# Altium PCB MainBoardCurrent.PcbDoc
Units mil, origin at the board's own origin, x right, y up, seen from the top; angles counter-clockwise.
Board outline 3540 x 3540 mil, 4 copper layers (Top Layer, PWR, GND, Bottom Layer), stack 61.418 mil thick; 53 components, 70 nets, 536 pads, 126 vias.
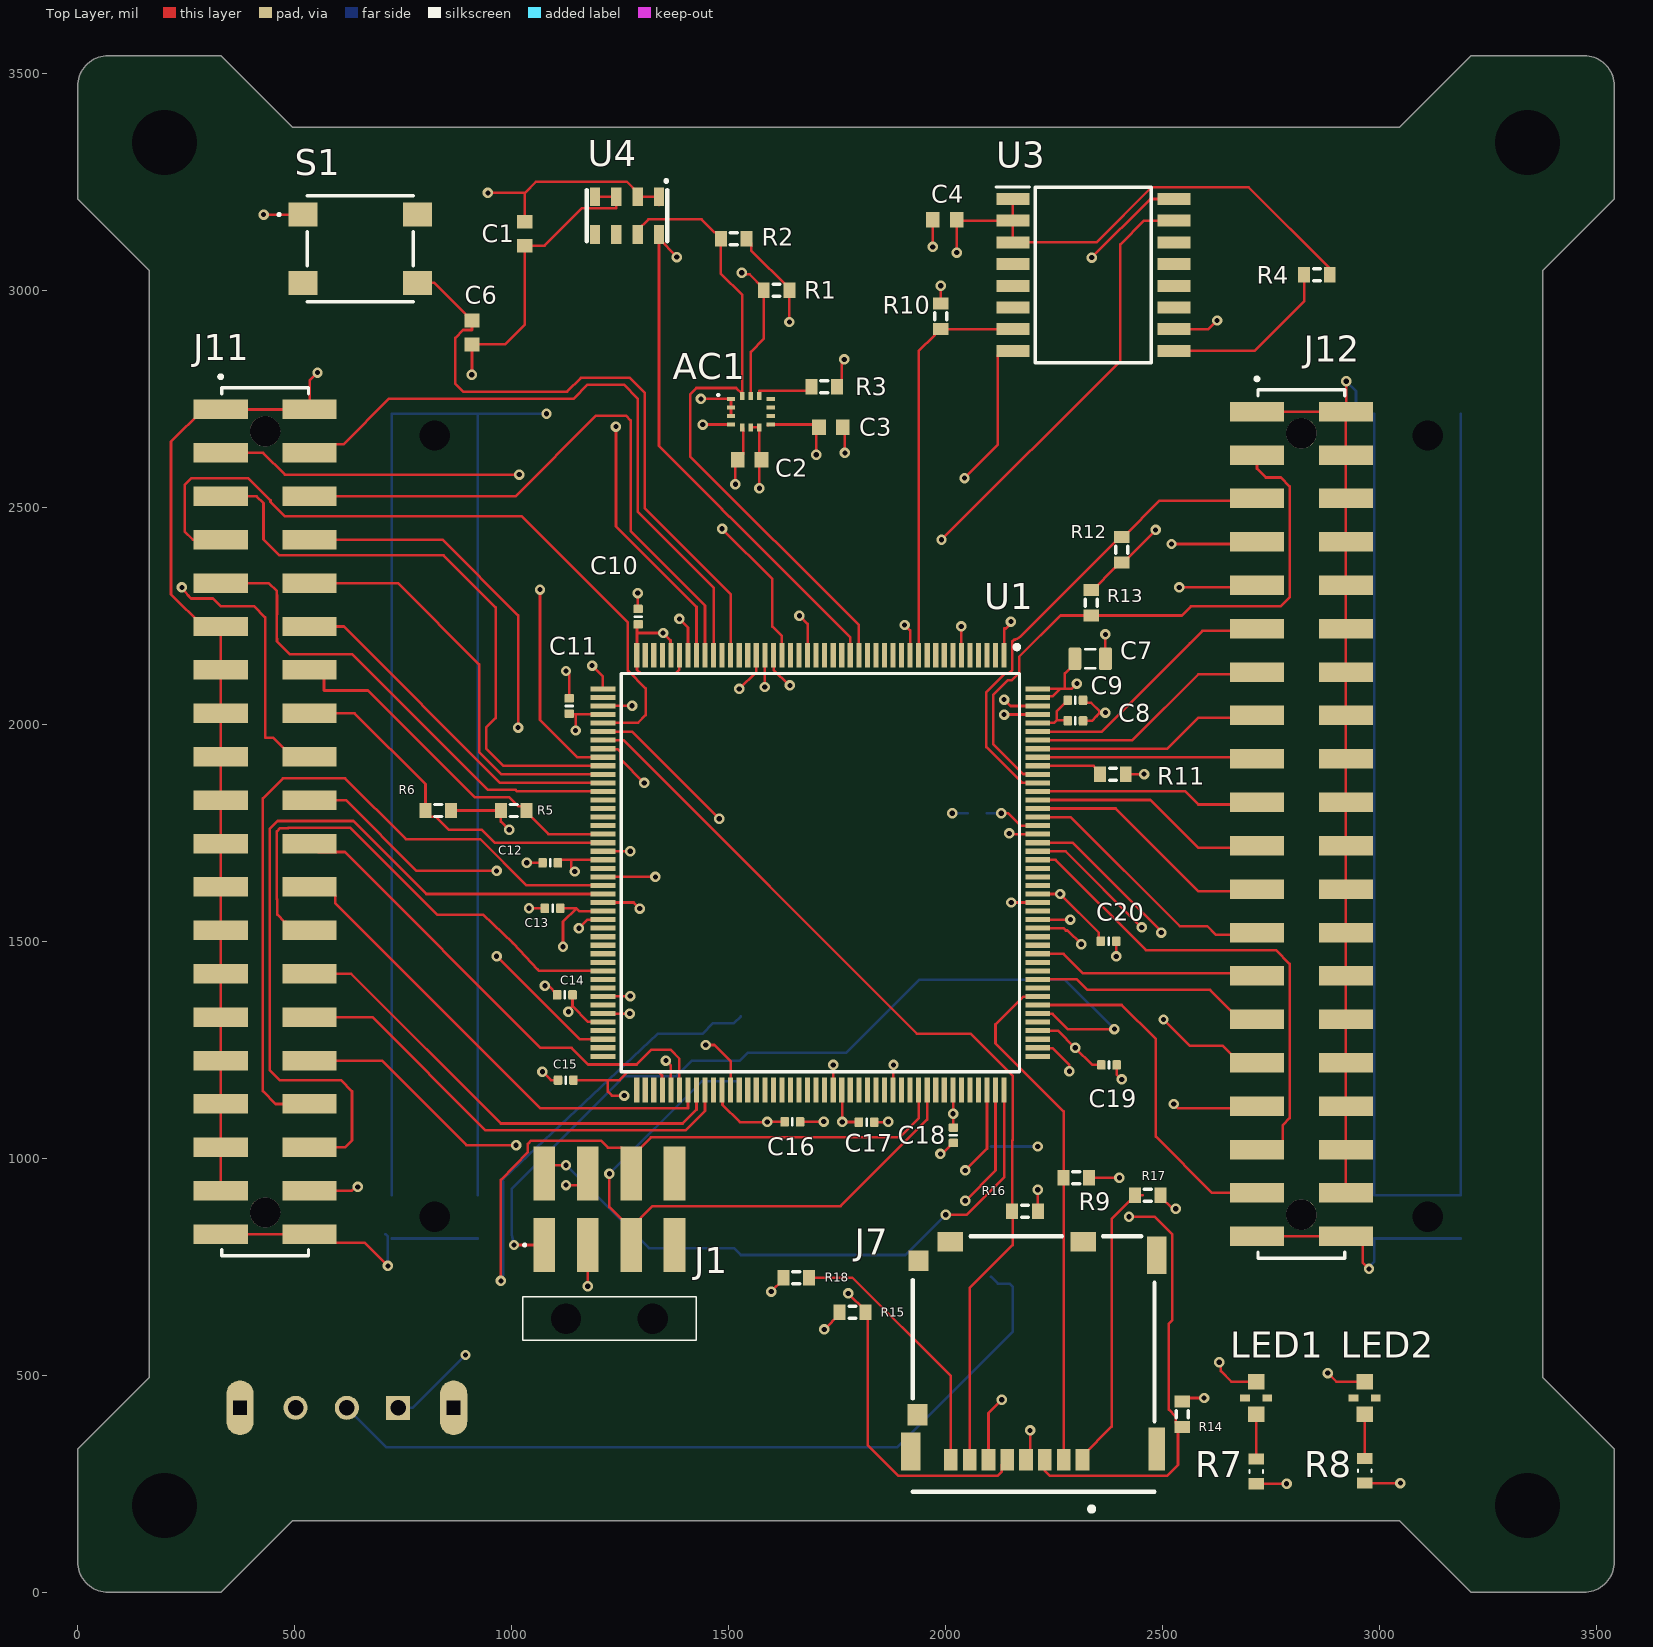
[diagram p0: Top Layer view]
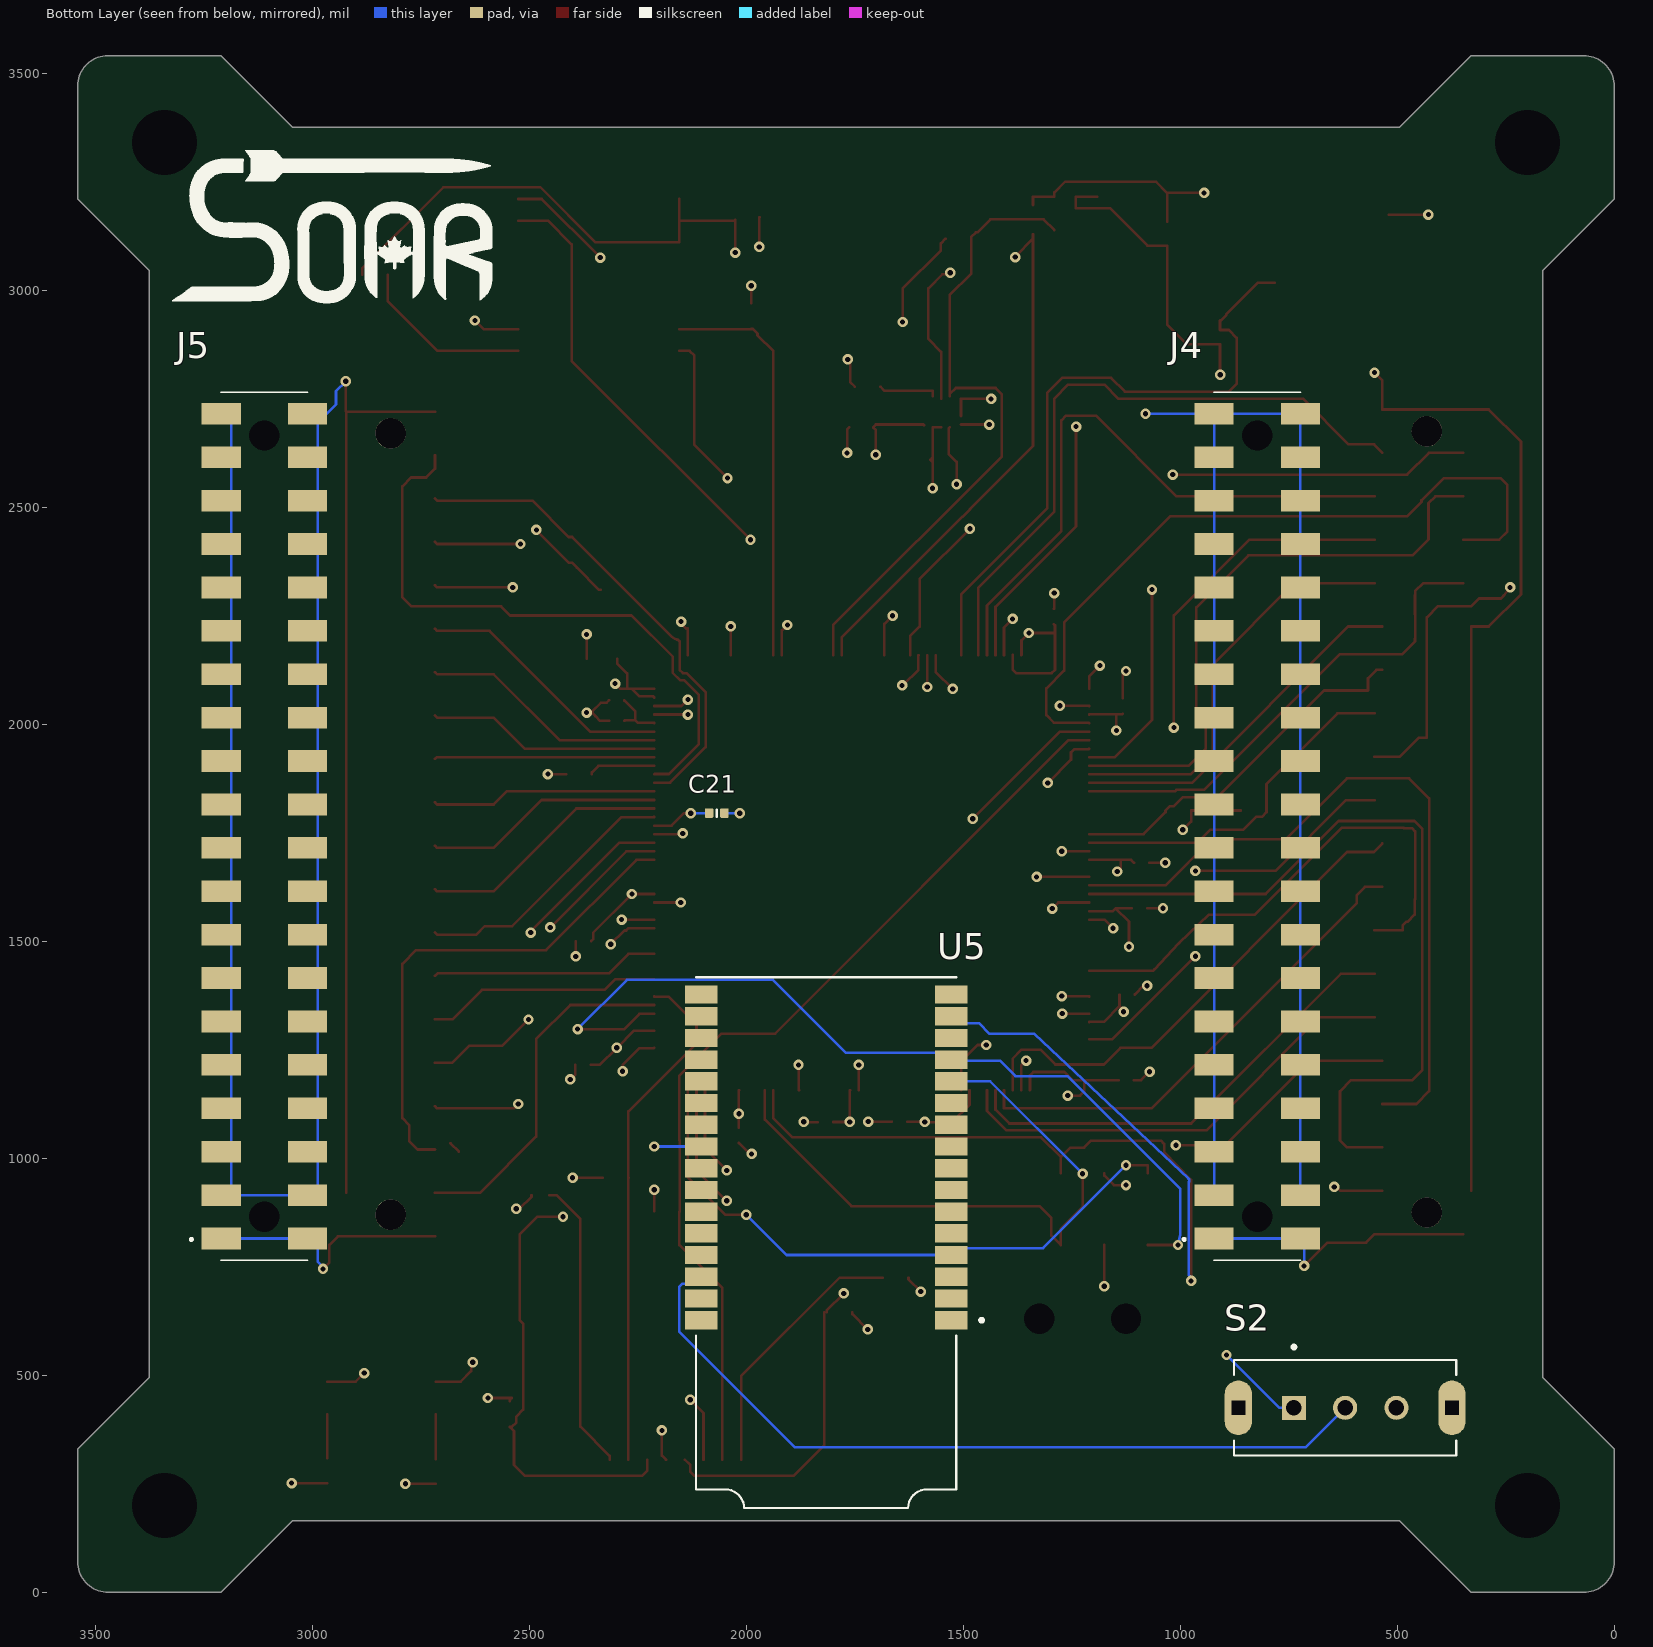
[diagram p1: Bottom Layer view, seen from below]
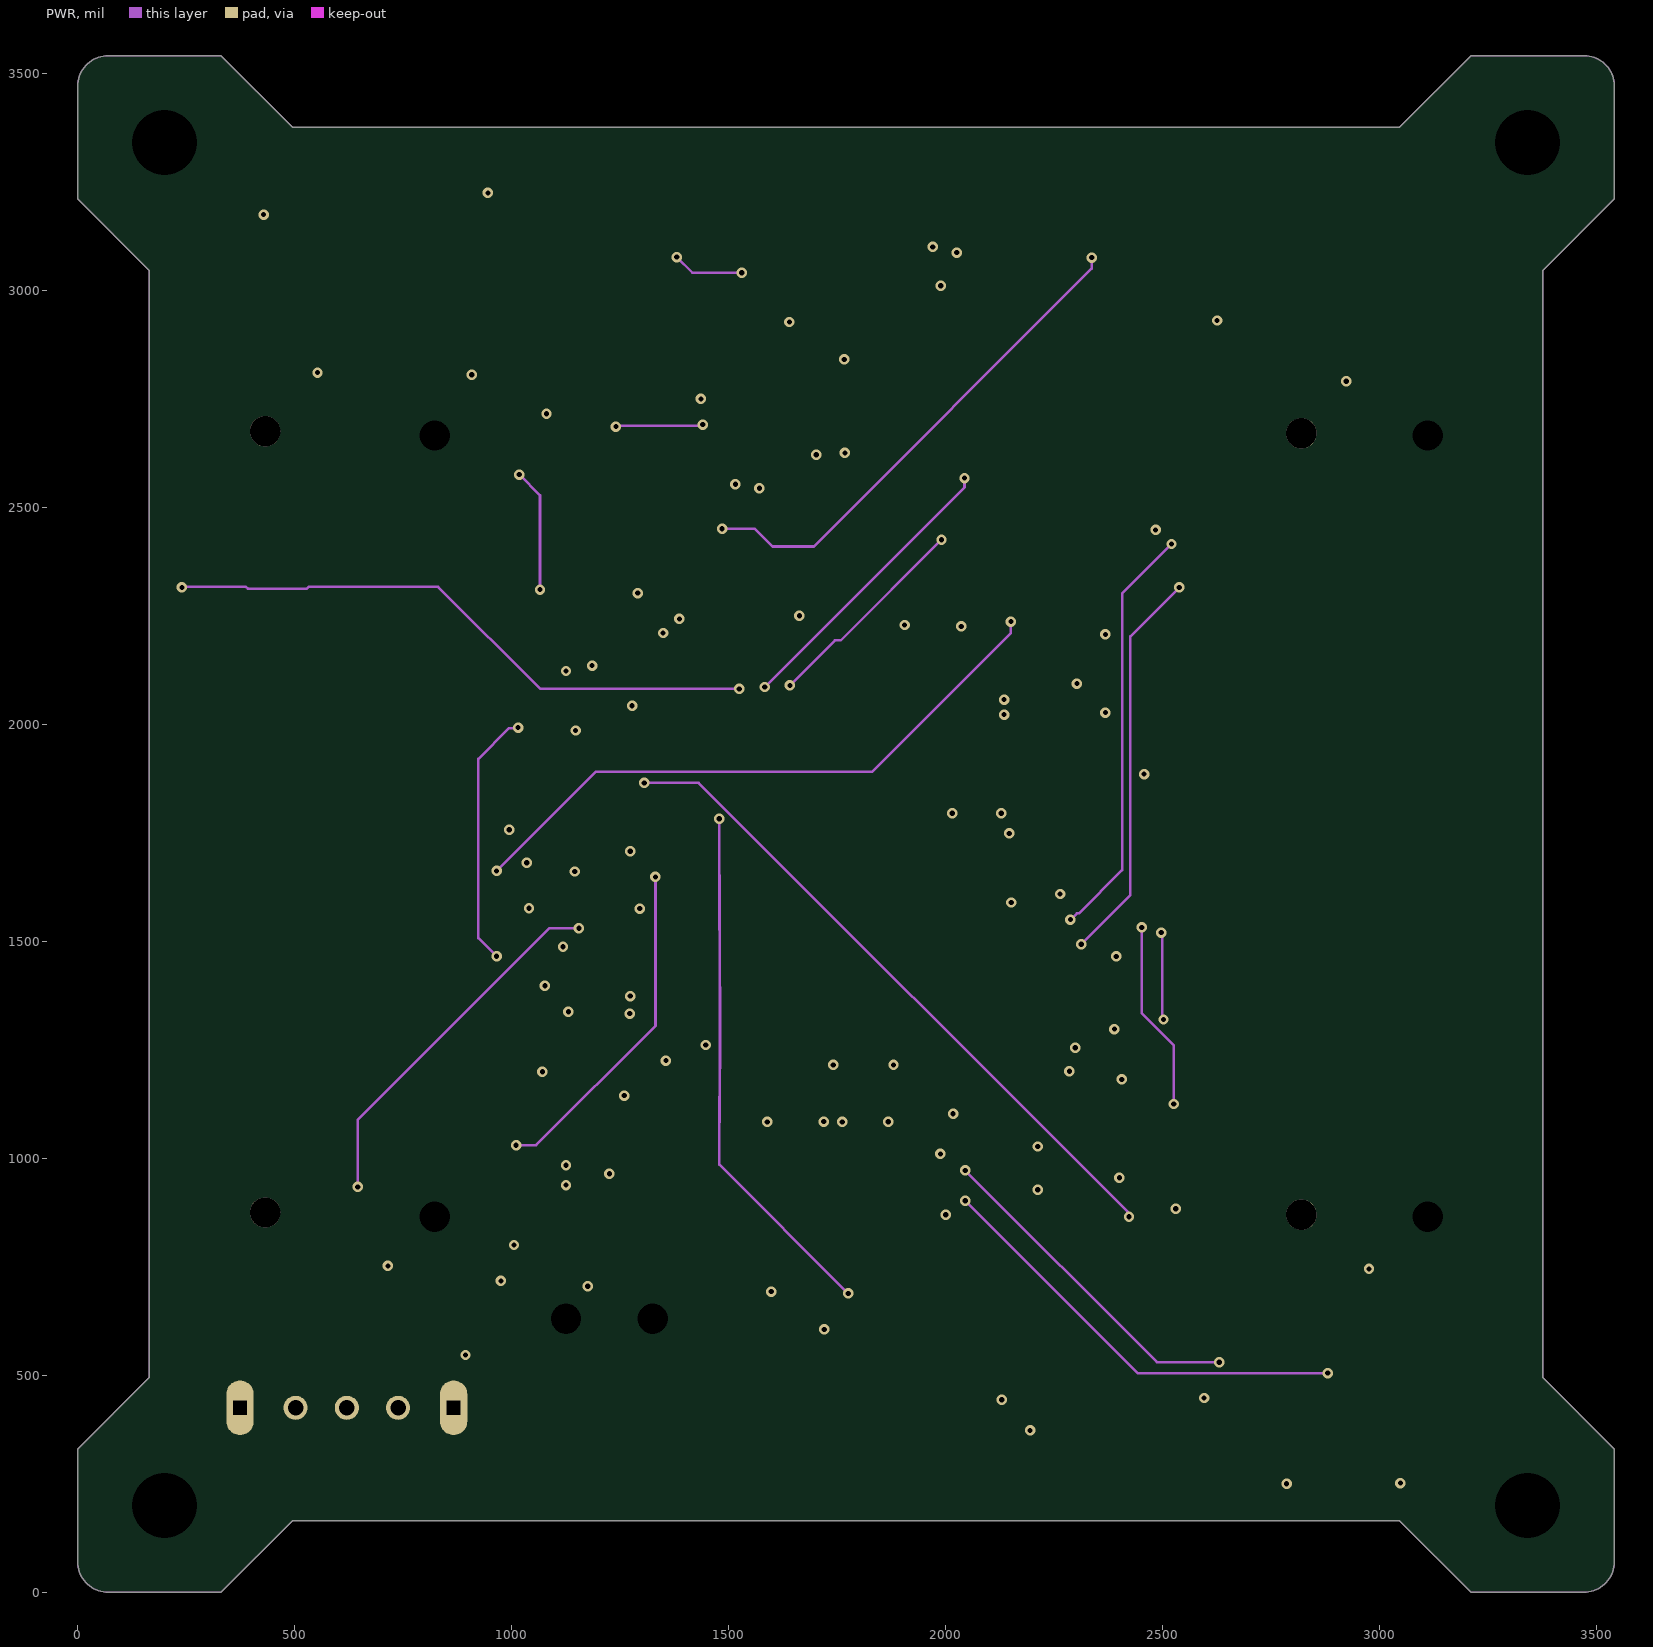
[diagram p2: PWR]
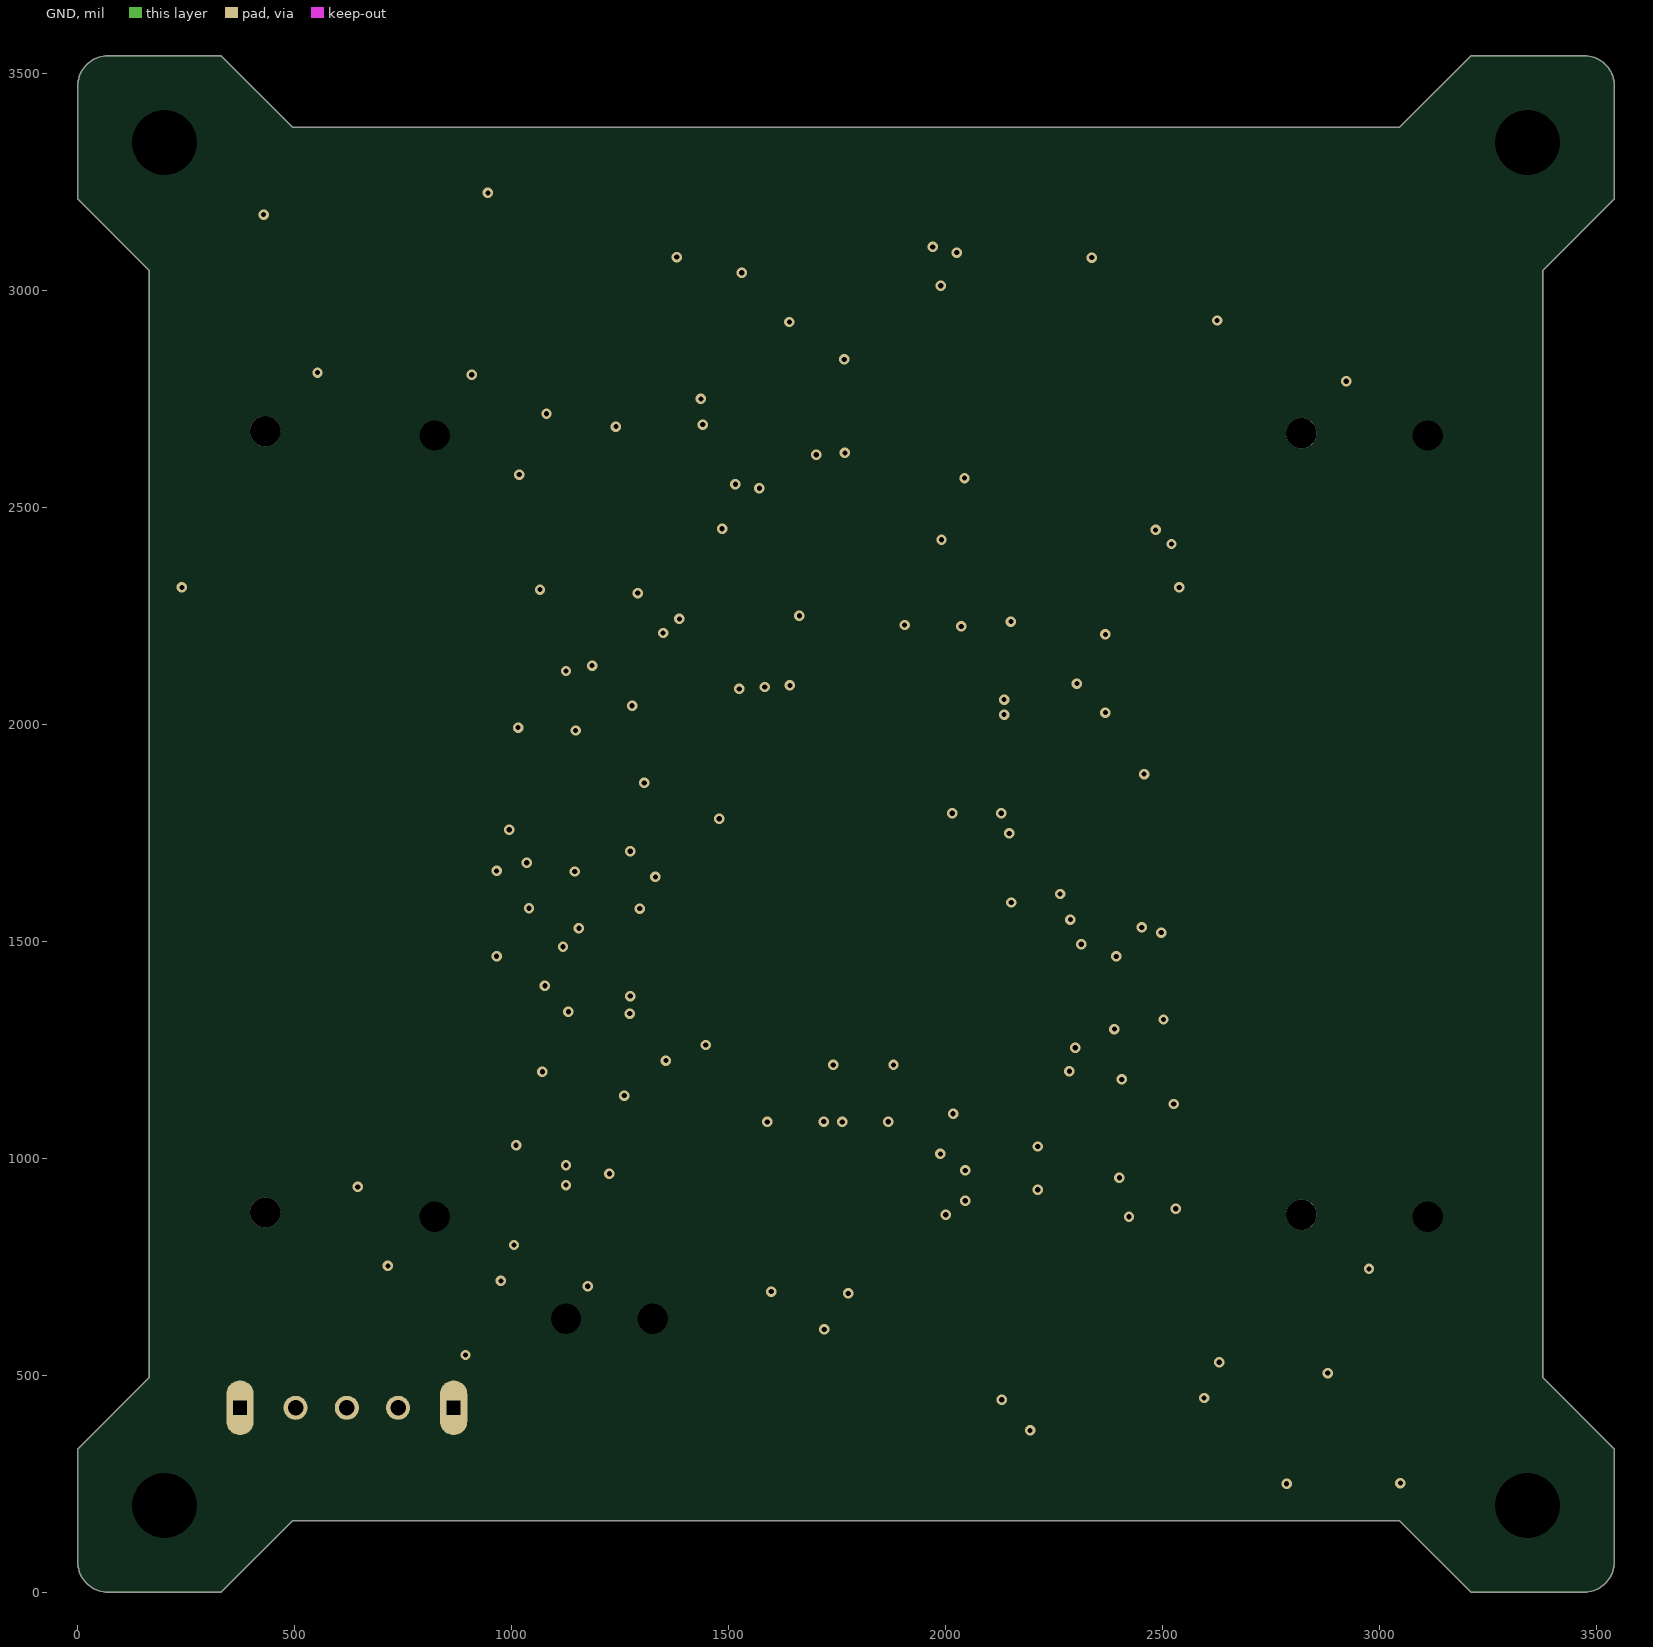
[diagram p3: GND]

## Layer stack, top to bottom
Top Solder: solder mask 0.4, Solder Resist, Dk 3.5
Top Layer: signal copper 1.378
Dielectric 2: prepreg 4.331, PP-006, Dk 4.29
PWR: signal copper 1.378
Dielectric 1: core 47.244, FR-4, Dk 4.6
GND: signal copper 1.378
Dielectric 3: prepreg 4.331, PP-006, Dk 4.29
Bottom Layer: signal copper 1.378
Bottom Solder: solder mask 0.4, Solder Resist, Dk 3.5

## Board outline
0,3470 cw(c70,3470) 70,3540 330,3540 495,3375 3045,3375 3210,3540 3471,3540 cw(c3471,3471) 3540,3471 3540,3210 3375,3045 3375,495 3540,330 3540,70 cw(c3470,70) 3470,0 3210,0 3045,165 495,165 330,0 70,0 cw(c70,70) 0,70 0,330 165,495 165,3045 0,3210

## Design rules (kind name [scope] priority, off if disabled: settings)
BoardOutlineClearance [All] p1: gap=15 ignorepadtopadclearanceinfootprint=FALSE
Clearance [All] p1: gap=10 ignorepadtopadclearanceinfootprint=TRUE except(0: Arc-Hole Track-Hole SMDPad-Hole THPad-Hole Via-Hole Fill-Hole Poly-Hole Region-Hole Text-Hole)
DiffPairsRouting [All] p1: maxlimit=20 minlimit=10 mostfreqgap=10 toplayer_minwidth=6 toplayer_maxwidth=15 toplayer_prefwidth=15 midlayer1_minwidth=6 midlayer1_maxwidth=15 midlayer1_prefwidth=15 midlayer2_minwidth=6 midlayer2_maxwidth=15 midlayer2_prefwidth=15 bottomlayer_minwidth=6 bottomlayer_maxwidth=15 bottomlayer_prefwidth=15 maxuncoupledlength=500
HoleSize [All] p1: absolutevalues=TRUE maxlimit=200 minlimit=12 maxpercent=80.000 minpercent=20.000
MinimumSolderMaskSliver [All] p1: minsoldermaskwidth=3.5
PolygonConnect PolygonConnect_8 [All vs IsNamedPolygon('Bottom_GND')] p1: thpad.connectstyle=Relief thpad.reliefconductorwidth=10 thpad.reliefentries=4 thpad.polygonreliefangle="90 Angle" thpad.airgapwidth=10 smdpad.connectstyle=Relief smdpad.reliefconductorwidth=10 smdpad.reliefentries=4 smdpad.polygonreliefangle="90 Angle" smdpad.airgapwidth=10 via.connectstyle=Direct via.reliefconductorwidth=10 via.reliefentries=4 via.polygonreliefangle="90 Angle" via.airgapwidth=10
PolygonConnect PolygonConnect_7 [All vs IsNamedPolygon('NONET_L03_P003')] p2: thpad.connectstyle=Relief thpad.reliefconductorwidth=10 thpad.reliefentries=4 thpad.polygonreliefangle="90 Angle" thpad.airgapwidth=10 smdpad.connectstyle=Relief smdpad.reliefconductorwidth=10 smdpad.reliefentries=4 smdpad.polygonreliefangle="90 Angle" smdpad.airgapwidth=10 via.connectstyle=Direct via.reliefconductorwidth=10 via.reliefentries=4 via.polygonreliefangle="90 Angle" via.airgapwidth=10
PolygonConnect PolygonConnect_6 [All vs IsNamedPolygon('3V3_PWR')] p3: thpad.connectstyle=Relief thpad.reliefconductorwidth=10 thpad.reliefentries=4 thpad.polygonreliefangle="90 Angle" thpad.airgapwidth=10 smdpad.connectstyle=Relief smdpad.reliefconductorwidth=10 smdpad.reliefentries=4 smdpad.polygonreliefangle="90 Angle" smdpad.airgapwidth=10 via.connectstyle=Direct via.reliefconductorwidth=10 via.reliefentries=4 via.polygonreliefangle="90 Angle" via.airgapwidth=10
PolygonConnect PolygonConnect_5 [All vs IsNamedPolygon('Top_GND')] p4: thpad.connectstyle=Direct thpad.reliefconductorwidth=10 thpad.reliefentries=4 thpad.polygonreliefangle="90 Angle" thpad.airgapwidth=10 smdpad.connectstyle=Relief smdpad.reliefconductorwidth=10 smdpad.reliefentries=4 smdpad.polygonreliefangle="90 Angle" smdpad.airgapwidth=10 via.connectstyle=Direct via.reliefconductorwidth=10 via.reliefentries=4 via.polygonreliefangle="45 Angle" via.airgapwidth=10
PolygonConnect PolygonConnect_4 [All vs IsNamedPolygon('Bottom_GND')] p5: thpad.connectstyle=Direct thpad.reliefconductorwidth=10 thpad.reliefentries=4 thpad.polygonreliefangle="90 Angle" thpad.airgapwidth=10 smdpad.connectstyle=Relief smdpad.reliefconductorwidth=10 smdpad.reliefentries=4 smdpad.polygonreliefangle="90 Angle" smdpad.airgapwidth=10 via.connectstyle=Relief via.reliefconductorwidth=10 via.reliefentries=4 via.polygonreliefangle="90 Angle" via.airgapwidth=10
PolygonConnect PolygonConnect_3 [All vs IsNamedPolygon('NONET_L03_P003')] p6: thpad.connectstyle=Direct thpad.reliefconductorwidth=10 thpad.reliefentries=4 thpad.polygonreliefangle="90 Angle" thpad.airgapwidth=10 smdpad.connectstyle=Relief smdpad.reliefconductorwidth=10 smdpad.reliefentries=4 smdpad.polygonreliefangle="90 Angle" smdpad.airgapwidth=10 via.connectstyle=Relief via.reliefconductorwidth=10 via.reliefentries=4 via.polygonreliefangle="90 Angle" via.airgapwidth=10
PolygonConnect PolygonConnect_2 [All vs IsNamedPolygon('3V3_PWR')] p7: thpad.connectstyle=Direct thpad.reliefconductorwidth=10 thpad.reliefentries=4 thpad.polygonreliefangle="90 Angle" thpad.airgapwidth=10 smdpad.connectstyle=Relief smdpad.reliefconductorwidth=10 smdpad.reliefentries=4 smdpad.polygonreliefangle="90 Angle" smdpad.airgapwidth=10 via.connectstyle=Relief via.reliefconductorwidth=10 via.reliefentries=4 via.polygonreliefangle="90 Angle" via.airgapwidth=10
PolygonConnect PolygonConnect_1 [All vs IsNamedPolygon('Top_GND')] p8: thpad.connectstyle=Direct thpad.reliefconductorwidth=10 thpad.reliefentries=4 thpad.polygonreliefangle="90 Angle" thpad.airgapwidth=10 smdpad.connectstyle=Relief smdpad.reliefconductorwidth=10 smdpad.reliefentries=4 smdpad.polygonreliefangle="90 Angle" smdpad.airgapwidth=10 via.connectstyle=Relief via.reliefconductorwidth=10 via.reliefentries=4 via.polygonreliefangle="90 Angle" via.airgapwidth=10
PolygonConnect [All] p9: connectstyle=Relief reliefconductorwidth=10 reliefentries=4 polygonreliefangle="90 Angle" airgapwidth=10
RoutingVias [All] p1: holewidth=12 width=24 viastyle="Through Hole" minholewidth=10 minwidth=20 maxholewidth=28 maxwidth=50
SilkToSolderMaskClearance [IsPad] p1: minsilkscreentomaskgap=1 clearancetoexposedcopper=TRUE
SolderMaskExpansion [All] p1: expansion=2 istentingtop=FALSE useseparateexpansions=TRUE expansionbottom=2 istentingbottom=FALSE
Width RF [InNetClass('RF')] p1: maxlimit=20 minlimit=6 preferedwidth=10 minimp=50.000000 maximp=50.000000 favimp=50.000000
Width Width_1 [All] p2: maxlimit=20 minlimit=6 preferedwidth=6 minimp=50.000000 maximp=50.000000 favimp=50.000000
26 further rules are at their usual default settings.

## Classes and differential pairs
polygon class Top_GND: STLINK-GND_L03_P003

## Components (designator, comment, footprint, x,y, rotation, side; value= is the part's Value field where it differs from the comment)
AC1 "LSM6DSOTR" LGA-14(2.5X3X0.86) 1550.77,2719.84 r0 top
C1 "0.1uF" 1608[0603] 1030,3130 r90 top
C2 "0.1uF" 1608[0603] 1547.85,2609.05 r0 top
C3 "0.1uF" 1608[0603] 1735.19,2683.92 r180 top
C4 "0.1uF" 1608[0603] 1997.44,3161.75 r0 top
C6 "0.1uF" 1608[0603] 908.26,2902.44 r90 top
C7 "Capacitor 4.7µF +/-40% 25V 0805" CAPC0805(2012)145_L 2332.62,2150.62 r0 top value=4.7µF
C8 "Capacitor 2,2µF +/-20% 10V 0402" CAPC0402(1005)60_L 2298.33,2007.7 r0 top value=2.2µF
C9 "Capacitor 2,2µF +/-20% 10V 0402" CAPC0402(1005)60_L 2298.33,2055.11 r0 top value=2.2µF
C10 "Capacitor 100nF +/-20% 25V 0402" CAPC0402(1005)60_L 1291.09,2247.76 r90 top value=100nF
C11 "Capacitor 100nF +/-20% 25V 0402" CAPC0402(1005)60_L 1132.15,2041.86 r90 top value=100nF
C12 "Capacitor 100nF +/-20% 25V 0402" CAPC0402(1005)60_L 1088.55,1680.65 r180 top value=100nF
C13 "Capacitor 100nF +/-20% 25V 0402" CAPC0402(1005)60_L 1094.03,1575.85 r180 top value=100nF
C14 "Capacitor 100nF +/-20% 25V 0402" CAPC0402(1005)60_L 1122.22,1376.35 r180 top value=100nF
C15 "Capacitor 100nF +/-20% 25V 0402" CAPC0402(1005)60_L 1124.22,1180 r180 top value=100nF
C16 "Capacitor 100nF +/-20% 25V 0402" CAPC0402(1005)60_L 1646.48,1083.74 r0 top value=100nF
C17 "Capacitor 100nF +/-20% 25V 0402" CAPC0402(1005)60_L 1817.36,1083.15 r0 top value=100nF
C18 "Capacitor 100nF +/-20% 25V 0402" CAPC0402(1005)60_L 2017.5,1052.85 r270 top value=100nF
C19 "Capacitor 100nF +/-20% 25V 0402" CAPC0402(1005)60_L 2375.88,1214.92 r0 top value=100nF
C20 "Capacitor 100nF +/-20% 25V 0402" CAPC0402(1005)60_L 2375,1500 r0 top value=100nF
C21 "Capacitor 100nF +/-20% 25V 0402" CAPC0402(1005)60_L 2067.72,1795 r180 bottom value=100nF
J1 "TSM-104-02-F-DH-A-P-TR" TSM-104-ZZ-YYY-DH-A-P-TR 1225,882.48 r180 top
J4 "HLE-120-02-L-DV-A" HLE-120-02-XXX-DV-A 822.59,1765 r270 bottom
J5 "HLE-120-02-L-DV-A" HLE-120-02-XXX-DV-A 3110,1765 r270 bottom
J7 "503182-1852" 5031821852 2202.52,330.26 r180 top
J11 "HW-20-16-L-D-250-SM-A-TR" SAMTEC_HW-20-16-L-D-250-SM-A-TR 329.27,2725 r270 top
J12 "HW-20-16-L-D-250-SM-A-TR" SAMTEC_HW-20-16-L-D-250-SM-A-TR 2716.78,2720 r270 top
LED1 "APTD2012LZGCK" FIL_0805J0500471MATE03 2715,447.6 r90 top
LED2 "APTD2012LQBC_D" FIL_0805J0500471MATE03 2965,447.6 r90 top
R1 "10K" J1-0603 1610,3000 r0 top value=1K
R2 "10K" J1-0603 1511.35,3118.54 r0 top value=1K
R3 "10K" J1-0603 1720,2777.37 r0 top value=1K
R4 "10K" J1-0603 2855,3035 r180 top value=1K
R5 "10K" J1-0603 1004.36,1801.06 r180 top value=1K
R6 "10K" J1-0603 830.75,1801.06 r0 top value=1K
R7 "800" RES_ERJU03F6800V 2715,278.54 r270 top value=1K
R8 "175" RES_ERJU03F6800V 2965,280 r270 top value=1K
R9 "10K" J1-0603 2300.47,955 r0 top value=1K
R10 "10K" J1-0603 1988.53,2940 r90 top value=1K
R11 "10K" J1-0603 2385,1885 r180 top value=1K
R12 "10K" J1-0603 2405,2401.75 r270 top value=1K
R13 "10K" J1-0603 2335,2280 r90 top value=1K
R14 "10K" J1-0603 2544.37,410.2 r90 top value=1K
R15 "10K" J1-0603 1785,645 r180 top value=1K
R16 "10K" J1-0603 2182.47,877.46 r0 top value=1K
R17 "10K" J1-0603 2465,915 r0 top value=1K
R18 "10K" J1-0603 1655.47,725 r180 top value=1K
S1 "430473035826" 430473035826 650.89,3095.26 r0 top
S2 "EG1206" SW_EG1206 620,425 r180 bottom
U1 "STM32H747IGT6" QFP50P2600X2600X160-176N 1711,1658 r270 top
U3 "W25Q256JVFIQ" SOIC127P1032X264-16N 2340,3035 r0 top
U4 "MS561101BA03-50" MS561101BA03-50 1265.39,3171.69 r270 top
U5 "STLINK-V3MODS" MODULE_STLINK-V3MODS 1815.81,237 r0 bottom

## Footprints (in the part's own frame and the unit in brackets; to place one, negate y for a bottom-side part, rotate by r counter-clockwise, add the part's x,y. Pads: shape width x height; smd on the part's side, far side on the other; paste and mask are expansions set on the pad)
1608[0603] [mm] "Chip Capacitor, Body 1.6x0.8mm, IPC High Density"
  rect 0.8x0.9 smd: 1(-0.7,0) 2(0.7,0)
  body extent -0.87,-0.48 0.87,0.48, height 1.3
5031821852 [mm]
  rect 0.8x1.24 smd: 1(-2.85,0.63) 2(-1.75,0.63) 3(-0.65,0.63) 4(0.45,0.63) 5(1.55,0.63) 6(2.65,0.63) 7(3.75,0.63) 8(4.85,0.63)
  rect 0.95x2.5 smd: 9(-7.195,0)
  rect 1.15x2.2 smd: 10(7.195,0.15) 15(-7.195,-11.33)
  rect 1.16x1.25 smd: 11(6.795,-2)
  rect 1.16x1.2 smd: 12(6.74,-11)
  rect 1.5x1.15 smd: 13(4.89,-12.125) 14(-2.89,-12.125)
  silkscreen extent -7.07,-12.45 7.07,3.66, body extent -7.47,-12.4 7.47,2.55, height 1.51
430473035826 [mm]
  rect 1.7x1.4 smd: 1(-3.35,2) 2(3.35,2) 3(-3.35,-2) 4(3.35,-2)
  silkscreen extent -4.8,-3.1 3.1,3.1, body extent -4.06,-3.1 4.06,3.1, height 3.8
CAPC0402(1005)60_L [mm] "Chip Capacitor, Body 1.0x0.5mm, Height 0.6mm, IPC High Density"
  rrect25% 0.5x0.55 smd: 1(-0.45,0) 2(0.45,0)
  silkscreen extent 0,-0.2 0,0.2, body extent -0.5,-0.25 0.5,0.25, height 0.6
CAPC0805(2012)145_L [mm] "Chip Capacitor, Body 2.0x1.2mm, Height 1.45mm, IPC High Density"
  rrect25% 0.76x1.3 smd: 1(-0.9,0) 2(0.89,0)
  silkscreen extent -0.3,-0.55 0.3,0.55, body extent -1,-0.6 1,0.6, height 1.45
FIL_0805J0500471MATE03 [mm]
  rect 0.9x0.95 smd: 1(-0.95,0) 2(0.95,0)
  rect 0.4x0.56 smd: 3(0,0.655) 4(0,-0.655)
HLE-120-02-XXX-DV-A [mm]
  rect 1.27x2.29 smd: 1(24.13,-2.525) 2(24.13,2.525) 3(21.59,-2.525) 4(21.59,2.525) 5(19.05,-2.525) 6(19.05,2.525) 7(16.51,-2.525) 8(16.51,2.525) 9(13.97,-2.525) 10(13.97,2.525) 11(11.43,-2.525) 12(11.43,2.525) 13(8.89,-2.525) 14(8.89,2.525) 15(6.35,-2.525) 16(6.35,2.525) 17(3.81,-2.525) 18(3.81,2.525) 19(1.27,-2.525) 20(1.27,2.525) 21(-1.27,-2.525) 22(-1.27,2.525) 23(-3.81,-2.525) 24(-3.81,2.525) 25(-6.35,-2.525) 26(-6.35,2.525) 27(-8.89,-2.525) 28(-8.89,2.525) 29(-11.43,-2.525) 30(-11.43,2.525) 31(-13.97,-2.525) 32(-13.97,2.525) 33(-16.51,-2.525) 34(-16.51,2.525) 35(-19.05,-2.525) 36(-19.05,2.525) 37(-21.59,-2.525) 38(-21.59,2.525) 39(-24.13,-2.525) 40(-24.13,2.525)
  round 0.89 hole 1.78 unplated: 41(22.86,0) 42(-22.86,0)
  silkscreen extent -25.4,-4.33 25.4,2.54
J1-0603 [mm] "Chip Resistor, Body 1.6x0.8mm, IPC High Density"
  rect 0.7x0.9 smd: 1(-0.75,0) 2(0.75,0)
  silkscreen extent -0.2,-0.35 0.2,0.35, body extent -0.85,-0.48 0.85,0.48, height 0.9
LGA-14(2.5X3X0.86) [mm]
  rect 0.475x0.25 smd: 1(-1.162,0.75) 2(-1.162,0.25) 3(-1.162,-0.25) 4(-1.162,-0.75) 8(1.162,-0.75) 9(1.162,-0.25) 10(1.162,0.25) 11(1.162,0.75)
  rect 0.25x0.475 smd: 5(-0.5,-0.913) 6(0,-0.913) 7(0.5,-0.913) 12(0.5,0.912) 13(0,0.912) 14(-0.5,0.912)
  silkscreen extent -1.93,0.95 -1.88,1.01, body extent -1.5,-1.25 1.5,1.25, height 0.86
MODULE_STLINK-V3MODS [mil]
  rect 74.8x42.13 smd: 1(-288.19,-390) 2(-288.19,-440) 3(-288.19,-490) 4(-288.19,-540) 5(-288.19,-590) 6(-288.19,-640) 7(-288.19,-690) 8(-288.19,-740) 9(-288.19,-790) 10(-288.19,-840) 11(-288.19,-890) 12(-288.19,-940) 13(-288.19,-990) 14(-288.19,-1040) 15(-288.19,-1090) 16(-288.19,-1140) 17(288.19,-1140) 18(288.19,-1090) 19(288.19,-1040) 20(288.19,-990) 21(288.19,-940) 22(288.19,-890) 23(288.19,-840) 24(288.19,-790) 25(288.19,-740) 26(288.19,-690) 27(288.19,-640) 28(288.19,-590) 29(288.19,-540) 30(288.19,-490) 31(288.19,-440) 32(288.19,-390)
  silkscreen extent -362,-1180 300,43
MS561101BA03-50 [mm]
  rect 1.1x0.6 smd: 1(-1.1,1.875) 2(-1.1,0.625) 3(-1.1,-0.625) 4(-1.1,-1.875) 5(1.1,-1.875) 6(1.1,-0.625) 7(1.1,0.625) 8(1.1,1.875)
  silkscreen extent -2.08,-2.35 1.5,2.35, body extent -1.5,-2.5 1.5,2.5, height 0.95
QFP50P2600X2600X160-176N [mm]
  rect 1.45x0.3 smd: 1(-12.725,10.75) 2(-12.725,10.25) 3(-12.725,9.75) 4(-12.725,9.25) 5(-12.725,8.75) 6(-12.725,8.25) 7(-12.725,7.75) 8(-12.725,7.25) 9(-12.725,6.75) 10(-12.725,6.25) 11(-12.725,5.75) 12(-12.725,5.25) 13(-12.725,4.75) 14(-12.725,4.25) 15(-12.725,3.75) 16(-12.725,3.25) 17(-12.725,2.75) 18(-12.725,2.25) 19(-12.725,1.75) 20(-12.725,1.25) 21(-12.725,0.75) 22(-12.725,0.25) 23(-12.725,-0.25) 24(-12.725,-0.75) 25(-12.725,-1.25) 26(-12.725,-1.75) 27(-12.725,-2.25) 28(-12.725,-2.75) 29(-12.725,-3.25) 30(-12.725,-3.75) 31(-12.725,-4.25) 32(-12.725,-4.75) 33(-12.725,-5.25) 34(-12.725,-5.75) 35(-12.725,-6.25) 36(-12.725,-6.75) 37(-12.725,-7.25) 38(-12.725,-7.75) 39(-12.725,-8.25) 40(-12.725,-8.75) 41(-12.725,-9.25) 42(-12.725,-9.75) 43(-12.725,-10.25) 44(-12.725,-10.75) 89(12.725,-10.75) 90(12.725,-10.25) 91(12.725,-9.75) 92(12.725,-9.25) 93(12.725,-8.75) 94(12.725,-8.25) 95(12.725,-7.75) 96(12.725,-7.25) 97(12.725,-6.75) 98(12.725,-6.25) 99(12.725,-5.75) 100(12.725,-5.25) 101(12.725,-4.75) 102(12.725,-4.25) 103(12.725,-3.75) 104(12.725,-3.25) 105(12.725,-2.75) 106(12.725,-2.25) 107(12.725,-1.75) 108(12.725,-1.25) 109(12.725,-0.75) 110(12.725,-0.25) 111(12.725,0.25) 112(12.725,0.75) 113(12.725,1.25) 114(12.725,1.75) 115(12.725,2.25) 116(12.725,2.75) 117(12.725,3.25) 118(12.725,3.75) 119(12.725,4.25) 120(12.725,4.75) 121(12.725,5.25) 122(12.725,5.75) 123(12.725,6.25) 124(12.725,6.75) 125(12.725,7.25) 126(12.725,7.75) 127(12.725,8.25) 128(12.725,8.75) 129(12.725,9.25) 130(12.725,9.75) 131(12.725,10.25) 132(12.725,10.75)
  rect 0.3x1.45 smd: 45(-10.75,-12.725) 46(-10.25,-12.725) 47(-9.75,-12.725) 48(-9.25,-12.725) 49(-8.75,-12.725) 50(-8.25,-12.725) 51(-7.75,-12.725) 52(-7.25,-12.725) 53(-6.75,-12.725) 54(-6.25,-12.725) 55(-5.75,-12.725) 56(-5.25,-12.725) 57(-4.75,-12.725) 58(-4.25,-12.725) 59(-3.75,-12.725) 60(-3.25,-12.725) 61(-2.75,-12.725) 62(-2.25,-12.725) 63(-1.75,-12.725) 64(-1.25,-12.725) 65(-0.75,-12.725) 66(-0.25,-12.725) 67(0.25,-12.725) 68(0.75,-12.725) 69(1.25,-12.725) 70(1.75,-12.725) 71(2.25,-12.725) 72(2.75,-12.725) 73(3.25,-12.725) 74(3.75,-12.725) 75(4.25,-12.725) 76(4.75,-12.725) 77(5.25,-12.725) 78(5.75,-12.725) 79(6.25,-12.725) 80(6.75,-12.725) 81(7.25,-12.725) 82(7.75,-12.725) 83(8.25,-12.725) 84(8.75,-12.725) 85(9.25,-12.725) 86(9.75,-12.725) 87(10.25,-12.725) 88(10.75,-12.725) 133(10.75,12.725) 134(10.25,12.725) 135(9.75,12.725) 136(9.25,12.725) 137(8.75,12.725) 138(8.25,12.725) 139(7.75,12.725) 140(7.25,12.725) 141(6.75,12.725) 142(6.25,12.725) 143(5.75,12.725) 144(5.25,12.725) 145(4.75,12.725) 146(4.25,12.725) 147(3.75,12.725) 148(3.25,12.725) 149(2.75,12.725) 150(2.25,12.725) 151(1.75,12.725) 152(1.25,12.725) 153(0.75,12.725) 154(0.25,12.725) 155(-0.25,12.725) 156(-0.75,12.725) 157(-1.25,12.725) 158(-1.75,12.725) 159(-2.25,12.725) 160(-2.75,12.725) 161(-3.25,12.725) 162(-3.75,12.725) 163(-4.25,12.725) 164(-4.75,12.725) 165(-5.25,12.725) 166(-5.75,12.725) 167(-6.25,12.725) 168(-6.75,12.725) 169(-7.25,12.725) 170(-7.75,12.725) 171(-8.25,12.725) 172(-8.75,12.725) 173(-9.25,12.725) 174(-9.75,12.725) 175(-10.25,12.725) 176(-10.75,12.725)
  silkscreen extent -13.32,-11.65 11.65,11.65
RES_ERJU03F6800V [mm]
  rect 0.65x0.9 smd: 1(-0.725,0) 2(0.725,0)
  silkscreen extent -0.08,-0.4 0.08,0.4
SAMTEC_HW-20-16-L-D-250-SM-A-TR [mm]
  rect 1.14x3.175 smd: 01(0,0) 02(0,5.205) 03(2.54,0) 04(2.54,5.205) 05(5.08,0) 06(5.08,5.205) 07(7.62,0) 08(7.62,5.205) 09(10.16,0) 10(10.16,5.205) 11(12.7,0) 12(12.7,5.205) 13(15.24,0) 14(15.24,5.205) 15(17.78,0) 16(17.78,5.205) 17(20.32,0) 18(20.32,5.205) 19(22.86,0) 20(22.86,5.205) 21(25.4,0) 22(25.4,5.205) 23(27.94,0) 24(27.94,5.205) 25(30.48,0) 26(30.48,5.205) 27(33.02,0) 28(33.02,5.205) 29(35.56,0) 30(35.56,5.205) 31(38.1,0) 32(38.1,5.205) 33(40.64,0) 34(40.64,5.205) 35(43.18,0) 36(43.18,5.205) 37(45.72,0) 38(45.72,5.205) 39(48.26,0) 40(48.26,5.205)
  round 1.78 hole 1.78 unplated: ""(1.27,2.603) ""(46.99,2.603)
  silkscreen extent -2.02,-0.1 49.53,5.14
SOIC127P1032X264-16N [mm]
  rect 1.93x0.7 smd: 1(-4.71,4.445) 2(-4.71,3.175) 3(-4.71,1.905) 4(-4.71,0.635) 5(-4.71,-0.635) 6(-4.71,-1.905) 7(-4.71,-3.175) 8(-4.71,-4.445) 9(4.71,-4.445) 10(4.71,-3.175) 11(4.71,-1.905) 12(4.71,-0.635) 13(4.71,0.635) 14(4.71,1.905) 15(4.71,3.175) 16(4.71,4.445)
  silkscreen extent -5.68,-5.14 3.4,5.15, body extent -5.16,-5.14 5.16,5.14, height 2.64
SW_EG1206 [mm]
  rect 1.408x1.408 / inner round 1.408 / far side rect 1.408x1.408 hole 0.9: 1(-3,0)
  round 1.408 hole 0.9: 2(0,0) 3(3,0)
  oval 1.6x3.2 hole 0.8 square: SH1(-6.25,0) SH2(6.25,0)
  silkscreen extent -6.5,-2.8 6.5,3.66, body extent -6.5,-5.8 6.5,2.8, height 6
TSM-104-ZZ-YYY-DH-A-P-TR [mm]
  rect 1.27x3.18 smd: 1(3.81,2.095) 2(3.81,-2.095) 3(1.27,2.095) 4(1.27,-2.095) 5(-1.27,2.095) 6(-1.27,-2.095) 7(-3.81,2.095) 8(-3.81,-2.095)
  round 0.89 hole 1.78 unplated: 9(2.54,6.4) 10(-2.54,6.4)
  silkscreen extent -5.08,2.05 5.08,7.67

## Part data
AC1: "Accelerometer", Manufacturer_Name=STMicroelectronics, Mouser Part Number=511-LSM6DSOTR, Arrow Part Number=LSM6DSOTR, Arrow Price/Stock=https://www.arrow.com/en/products/lsm6dsotr/stmicroelectronics?region=nac, Datasheet Link=https://www.st.com/resource/en/datasheet/lsm6dso.pdf, Manufacturer_Part_Number=LSM6DSOTR, Mouser Price/Stock=https://www.mouser.co.uk/ProductDetail/STMicroelectronics/LSM6DSOTR?qs=lc2O%252BfHJPVbD197C5c7oNw%3D%3D
C1 C2 C3 C4 C6: library part Cap, "Capacitor", LatestRevisionDate=17-Jul-2002, LatestRevisionNote="Re-released for DXP Platform.", PackageDescription="Radial Cap, Thru-Hole; 2 Leads; 0.3 in Pin Spacing", PackageReference=RAD-0.3, Published=8-Jun-2000, Publisher="Altium Limited"
C7: library part CMP-001-00080-4, "Chip Capacitor, 4.7µF +/-40%, 25V, 0805, Thickness 1.45 mm", Case/Package=0805, Max Operating Temperature=85°C, Min Operating Temperature=-55°C, Tolerance=20%, Voltage Rating=25V, Mounting Technology=SMT, Pins=2
C8 C9: library part CMP-001-00056-4, "Chip Capacitor, 2,2µF +/-20%, 10V, 0402, Thickness 0.6 mm", Case/Package=0402, Max Operating Temperature=85°C, Min Operating Temperature=-55°C, Tolerance=10%, Voltage Rating=10V, Mounting Technology=SMT, Pins=2
C10 C11 C12 C13 C14 C15 C16 C17 C18 C19 C20 C21: library part CMP-001-00065-4, "Chip Capacitor, 100nF +/-20%, 25V, 0402, Thickness 0.6 mm", Case/Package=0402, Max Operating Temperature=85°C, Min Operating Temperature=-55°C, Tolerance=10%, Voltage Rating=25V, Mounting Technology=SMT, Pins=2
J1: "Connector", Manufacturer_Name=SAMTEC, Datasheet Link=http://suddendocs.samtec.com/prints/tsm-1xx-xx-xxx-xx-xx-xxx-xx-mkt1.pdf, Manufacturer_Part_Number=TSM-104-02-F-DH-A-P-TR
J4 J5: "Connector", Manufacturer_Name=SAMTEC, Mouser Part Number=200-HLE12002LDVA, Arrow Part Number=HLE-120-02-L-DV-A, Arrow Price/Stock=https://www.arrow.com/en/products/hle-120-02-l-dv-a/samtec?region=nac, Datasheet Link=http://suddendocs.samtec.com/prints/hle-1xx-02-xxx-dv-xx-xx-xx-mkt.pdf, Manufacturer_Part_Number=HLE-120-02-L-DV-A, Mouser Price/Stock=https://www.mouser.co.uk/ProductDetail/Samtec/HLE-120-02-L-DV-A?qs=0lQeLiL1qyZq0rwGrAI%2FeQ%3D%3D
J7: "Connector", Manufacturer_Name=Molex, Mouser Part Number=538-503182-1852, Datasheet Link=https://www.molex.com/pdm_docs/sd/5031821852_sd.pdf, Manufacturer_Part_Number=503182-1852, Mouser Price/Stock=https://www.mouser.co.uk/ProductDetail/Molex/503182-1852?qs=s7UCm7gO1bZmpyAhCKZ26g%3D%3D
J11 J12: Package=None, Availability=Unavailable, MP=HW-20-16-L-D-250-SM-A-TR, Price=None
LED1: "LED", Manufacturer_Name=Kingbright, Mouser Part Number=604-APTD2012LZGCK, Arrow Part Number=APTD2012LZGCK, Arrow Price/Stock=https://www.arrow.com/en/products/aptd2012lzgck/kingbright?region=nac, Datasheet Link=http://www.kingbrightusa.com/images/catalog/SPEC/APTD2012LZGCK.pdf, Height=1.05mm, Manufacturer_Part_Number=APTD2012LZGCK, Mouser Price/Stock=https://www.mouser.co.uk/ProductDetail/Kingbright/APTD2012LZGCK?qs=AQlKX63v8RvUnlqpSGhMeA%3D%3D
LED2: "LED", Arrow Part Number=APTD2012LQBC/D, Manufacturer_Name=Kingbright, Mouser Part Number=604-APTD2012LQBCD, Arrow Price/Stock=https://www.arrow.com/en/products/aptd2012lqbcd/kingbright, Datasheet Link=https://componentsearchengine.com/Datasheets/1/APTD2012LQBC_D.pdf, Height=1.2mm, Manufacturer_Part_Number=APTD2012LQBC/D, Mouser Price/Stock=https://www.mouser.co.uk/ProductDetail/Kingbright/APTD2012LQBC-D?qs=AQlKX63v8RvDGqprk6aUCg%3D%3D
R1 R2 R3 R4 R5 R6 R7 R8 R9 R10 R11 R12 R13 R14 R15 R16 R17 R18: library part Res3, "Resistor", LatestRevisionDate=29-May-2009, LatestRevisionNote="IPC-7351 Footprint Added.", PackageDescription="Chip Resistor", PackageReference=J1-0603, Published=8-Jun-2000, Publisher="Altium Limited"
S1: "Switch", Manufacturer_Name="Wurth Elektronik", Mouser Part Number=710-430473035826, Datasheet Link=https://componentsearchengine.com/Datasheets/2/430473035826.pdf, Height=3.7mm, Manufacturer_Part_Number=430473035826, Mouser Price/Stock=https://www.mouser.co.uk/ProductDetail/Wurth-Elektronik/430473035826?qs=wr8lucFkNMX7XPiy2wLoYQ%3D%3D
S2: library part CMP-009-000000-1, Package=None, Availability=Unavailable, Design Item ID=EG1206, MP=EG1206, Price=None, Source=EG1206.SchLib
U1: "ARM Microcontrollers - MCU 16/32-BITS MICROS", Manufacturer_Name=STMicroelectronics, Mouser Part Number=511-STM32H747IGT6, Arrow Part Number=STM32H747IGT6, Arrow Price/Stock=https://www.arrow.com/en/products/stm32h747igt6/stmicroelectronics?region=nac, Datasheet Link=https://www.mouser.com/datasheet/2/389/dm00602212-1799407.pdf, Geometry.Height=1.6mm, Manufacturer_Part_Number=STM32H747IGT6, Mouser Price/Stock=https://www.mouser.co.uk/ProductDetail/STMicroelectronics/STM32H747IGT6?qs=%252B6g0mu59x7Kw%252BsPEalqvLg%3D%3D
U3: "Integrated Circuit", Manufacturer_Name=Winbond, Mouser Part Number=454-W25Q256JVFIQ, Arrow Part Number=W25Q256JVFIQ, Arrow Price/Stock=https://www.arrow.com/en/products/w25q256jvfiq/winbond-electronics?region=nac, Datasheet Link=https://www.winbond.com/hq/search-resource-file.jsp?partNo=W25Q256JVFIQ&type=datasheet, Height=2.64mm, Manufacturer_Part_Number=W25Q256JVFIQ, Mouser Price/Stock=https://www.mouser.co.uk/ProductDetail/Winbond/W25Q256JVFIQ?qs=qSfuJ%252Bfl%2Fd66Mf%2FmOCw4Wg%3D%3D
U4: "Integrated Circuit", Manufacturer_Name="TE Connectivity", Mouser Part Number=824-MS561101BA03-50, Arrow Part Number=MS561101BA03-50, Arrow Price/Stock=https://www.arrow.com/en/products/ms561101ba03-50/te-connectivity?region=nac, Datasheet Link=http://www.te.com/usa-en/search.html?q=ms5611&source=header, Manufacturer_Part_Number=MS561101BA03-50, Mouser Price/Stock=https://www.mouser.co.uk/ProductDetail/Measurement-Specialties/MS561101BA03-50?qs=%252BgKeJhng5iV%252BnCz6Qd5iDw%3D%3D
U5: library part CMP-005-000000-1, Package=None, Availability=Unavailable, Component Type=Standard, Design Item ID=STLINK-V3MODS, MP=STLINK-V3MODS, Pin Count=32, Price=None, Source=STLINK-V3MODS.SchLib

## Free pads (board coordinates)
  round 60 hole 150 unplated mask+10: 2(200,200) 2(200,3340) 2(3340,200) 2(3340,3340)

## Via types
v1: diameter 24, hole 12, Top Layer to Bottom Layer, 126 vias

## Nets (pads, with @x,y where several pads share a name; then routed paths per layer and width w, separated by ;. In a path a pad name is that pad's centre, name@x,y a point inside that pad or via, vN(x,y) a via of type N, cw(c..) or ccw(c..) an arc to the next point about the centre after c; other vN are vias at no path point)
3V3: AC1.5 AC1.8 C1.2 C2.1 C3.2 C4.2 C7.1 C10.1 C11.1 C12.1 C13.1 C14.1 C15.1 C16.1 C17.1 C18.1 C19.1 C20.1 C21.1 J1.4 J4.1 J4.2 J7.4 J11.39 J11.40 R1.2 R2.2 R3.2 R4.1 R5.2 R6.2 R9.2 R10.2 R11.1 R12.2 R13.2 R14.2 R15.2 R16.2 R17.2 R18.2 S2.1 U1.39 U1.40 U1.44 U1.48 U1.65 U1.71 U1.84 U1.92 U1.99 U1.113 U1.126 U1.136 U1.152 U1.160 U1.175 U1.176 U3.1 U3.2 U3.3 U4.1 U4.2 | length 6714.9
  Top Layer w6: J11.39@347.52,825 552.44,825 571.88,805.56 661.1,805.56 v1(714.66,752) ; R6.2 R5.2 974.83,1775.79 v1(993.99,1756.62) ; v1(945,3224) 1030,3224 ; C1.2 1030,3224 ; C12.1@1106.27,1680.69 1113.11,1687.53 1136.59,1687.53 ; C13.1 1148.7,1575.85 ; v1(1117.94,1487.38) 1117.94,1545.08 1148.7,1575.85 ; v1(1125,938) 1153,938 1175,960 J1.4 ; v1(1130.4,1337.57) 1130.4,1340.9 1139.94,1350.44 ; C11.1 1133.34,2022.95 1147,2022.95 ; C14.1 1139.94,1350.44 ; C15.1 1221.38,1180 ; v1(1145,1660.55) 1136.59,1668.96 1136.59,1687.53 ; v1(1147,1985.4) 1147,2022.95 ; U1.84 1209.24,1314.29 1176.09,1314.29 1139.94,1350.44 ; U1.71 1155.13,1569.42 1148.7,1575.85 ; U1.65 1136.59,1687.53 ; U1.48 1209.24,2022.95 1147,2022.95 ; v1(1259.25,1144.17) 1230.83,1144.17 1221.38,1153.62 1221.38,1180 ; C10.1 1288.55,2227.5 1288.55,2210 ; U4.1@1339.21,3196 U4.1 U4.2 1290,3224.84 1265.19,3249.65 1055.65,3249.65 1030,3224 ; U1.92 1346.05,1157.79 1346.05,1190.94 1338.43,1198.56 1267.12,1198.56 1248.56,1180 1221.38,1180 ; U1.40 1365.73,2159.76 1365.73,2192.91 v1(1348.64,2210) 1288.55,2210 ; U1.39@1385.42,2159.76 U1.39 1385.42,2158.21 1385.42,2125.06 1377.8,2117.44 1296.17,2117.44 1288.55,2125.06 1288.55,2158.21 U1.44 1288.55,2159.76 1288.55,2210 ; U1.99 1485.4,1156.24 1485.4,1123.09 1525.34,1083.15 ; v1(1515.21,2552.92) 1515.21,2603.97 C2.1 1532.84,2621.6 1532.84,2682.16 AC1.5 ; R2.2 1551.66,3107.76 1551.66,3091.81 1639.53,3003.94 R1.2 v1(1639.53,2926.47) ; v1(1588.77,1083.74) C16.1 ; AC1.8@1590.18,2688.39 1592.1,2690.32 AC1.8 1701.23,2690.32 C3.2 1701.23,2677.52 v1(1701.23,2620.86) ; v1@1595,692.84 v1(1597.72,692.84) 1625.94,721.06 R18.2 ; v1@1720,605 v1(1720,605.59) 1755.47,641.06 R15.2 ; R3.2 1760.31,2788.15 1760.31,2829.89 1766,2835.58 v1(1766,2840.45) v1@1765.08,2839.54 ; U1.113 1760.99,1156.24 1760.99,1084.34 v1(1761.59,1083.74) 1761.88,1083.45 1799.35,1083.45 C17.1 ; R10.2 v1(1988.53,3010) ; U1.126 2016.81,1156.32 v1(2016.81,1102.57) 2016.81,1071.26 C18.1 ; v1(2025,3086.37) C4.2 2026.75,3160 U3.2 ; v1(2127.69,1795) 2143.09,1795 2171.82,1766.27 U1.160 ; U3.1 U3.2 ; J7.4 2194.18,314.83 v1(2194.18,373) ; R16.2 v1(2212,927.28) ; U1.136 2258.49,1293.83 v1(2297.95,1254.37) 2337.4,1214.92 C19.1 ; U1.152 v1(2263.35,1608.79) 2352.31,1519.83 2352.31,1504.98 C20.1 ; U1.175 2214.89,2064.45 2246.76,2064.45 2263.54,2081.23 ; U1.176 2263.54,2081.23 ; C7.1 2297.19,2139.99 2274.07,2116.87 2274.07,2081.23 ; v1(2302,2093.47) 2289.75,2081.23 2274.07,2081.23 ; R9.2 v1(2400,955) ; R13.2 2338.94,2309.53 2390.28,2360.87 2390.28,2361.44 2401.06,2372.22 R12.2 2408.94,2372.22 2483.29,2446.57 v1(2483.29,2447.44) ; R11.1 v1(2456.83,1885) ; R17.2 2494.53,911.06 2521.94,883.65 v1(2529.49,883.65) ; R14.2 2544.37,443.3 R14.2@2540.07,447.6 ; R4.1 2884.53,3049.72 2697.25,3237 2474,3237 2347,3110 U3.3 U3.2 ; 1525.34,1083.15 1588.77,1083.15 1525.34,1083.15 ; 2263.54,2081.23 2274.07,2081.23 ; R14.2@2540.07,447.6 v1(2595,447.6) R14.2@2540.07,447.6
  Bottom Layer w6: J4.2@708.68,825.07 J4.2@714.66,819.09 ; v1@718.1,755.44 v1(714.66,752) ; J4.2 J4.1 ; S2.1 771.64,425 v1(893.32,546.68) ; C21.1@2094.38,1795 v1(2127.69,1795) ; v1(714.66,752) J4.2@714.66,819.09 ; v1(714.66,752) J4.2@714.66,819.09
5V: J5.1 J5.2 J12.39 J12.40 | length 587
  Top Layer w6: J12.39 J12.40 2940.71,820 2960.15,800.56 2960.15,759.85 v1(2975,745)
  Bottom Layer w6: v1(2975,745) 2975,749.87 2987.04,761.91 2987.04,766.91 2987.08,766.95 2987.08,815 J5.1@3185.9,815
GND: AC1.1 AC1.2 AC1.3 AC1.6 AC1.7 C1.1 C2.2 C3.1 C4.1 C6.1 C7.2 C8.2 C9.2 C10.2 C11.2 C12.2 C13.2 C14.2 C15.2 C16.2 C17.2 C18.2 C19.2 C20.2 C21.2 J1.3 J4.3 J4.4 J4.5 J4.6 J4.7 J4.8 J4.9 J4.10 J4.11 J4.12 J4.13 J4.14 J4.15 J4.16 J4.17 J4.18 J4.19 J4.20 J4.21 J4.22 J4.23 J4.24 J4.25 J4.26 J4.27 J4.28 J4.29 J4.30 J4.31 J4.32 J4.33 J4.34 J4.35 J4.36 J4.37 J4.38 J4.39 J4.40 J5.3 J5.4 J5.5 J5.6 J5.7 J5.8 J5.9 J5.10 J5.11 J5.12 J5.13 J5.14 J5.15 J5.16 J5.17 J5.18 J5.19 J5.20 J5.21 J5.22 J5.23 J5.24 J5.25 J5.26 J5.27 J5.28 J5.29 J5.30 J5.31 J5.32 J5.33 J5.34 J5.35 J5.36 J5.37 J5.38 J5.39 J5.40 J7.6 J11.01 J11.02 J11.11 J11.13 J11.15 J11.17 J11.19 J11.21 J11.23 J11.25 J11.27 J11.29 J11.31 J11.33 J11.35 J11.37 J12.01 J12.02 J12.04 J12.06 J12.08 J12.10 J12.12 J12.14 J12.16 J12.18 J12.20 J12.22 J12.24 J12.26 J12.28 J12.30 J12.32 J12.34 J12.36 J12.38 R7.2 R8.2 S1.1 U1.6 U1.12 U1.24 U1.38 U1.45 U1.47 U1.64 U1.70 U1.81 U1.83 U1.93 U1.100 U1.112 U1.119 U1.134 U1.151 U1.159 U1.173 U1.174 U3.10 U4.3 U4.4 U5.24 | length 17851.1
  Top Layer w6: J11.37 J11.35 J11.33 J11.31 J11.29 J11.27 J11.25 J11.23 J11.21 J11.19 J11.17 J11.15 J11.13 J11.11 289.21,2225 215,2299.21 215,2650.79 289.21,2725 J11.01 J11.02 534.19,2791.75 v1(552.44,2810) ; v1(428.25,3174) S1.1 ; v1(908,2805) 908.26,2805.26 C6.1 984,2874.88 1030,2920.88 C1.1 1075.44,3102.44 1161.79,3188.79 1240.79,3188.79 U4.3 U4.4 ; v1(1034.27,1680.65) C12.2 ; v1(1039.76,1575.85) C13.2 ; v1(1070.63,1199.37) 1090,1180 C15.2 ; v1(1076.31,1397.42) 1084.42,1397.42 1104.51,1377.33 C14.2 ; v1(1125,2122.54) 1132.15,2115.39 C11.2 ; v1(1175,705) J1.3 ; v1(1185,2135) 1210.02,2109.98 U1.45 ; U1.83 v1(1271.87,1333.2) ; U1.81 1210.53,1373.08 1272.48,1373.08 v1(1273,1373.6) ; U1.70 1280.9,1589.1 v1(1295,1575) ; U1.64 v1(1273,1707.21) ; U1.47 1210.29,2042.13 1276.92,2042.13 v1(1277.2,2042.41) ; v1(1290,2302) 1290,2266.57 C10.2 ; v1(1355,1225) 1366.51,1213.49 U1.93 ; v1(1386.2,2242.51) 1405.88,2222.82 U1.38 ; v1(1435.78,2749.37) AC1.1 AC1.2 AC1.3 ; v1(1446.74,1260.91) 1467.04,1260.91 1504.31,1223.64 U1.100 ; AC1.6 AC1.7 C2.2@1570.45,2614 ; v1(1570.45,2543.29) C2.2@1570.45,2604.09 ; v1(1662.7,2250) 1681.47,2231.23 U1.24 ; C16.2 1664.49,1084.04 1718.23,1084.04 v1(1718.53,1084.34) ; U1.112 v1(1740.53,1215) ; C3.1 1767.56,2679.11 v1(1767.56,2625) ; C17.2 1866.69,1083.15 v1(1867.46,1083.92) ; U1.119 1878.89,1157.58 1878.89,1214.43 v1(1879.45,1215) ; v1(1905,2228.39) 1917.69,2215.7 U1.12 ; C4.1@1969.38,3167.85 1969.88,3167.35 C4.1 v1(1969.88,3099.62) ; v1(1987.54,1010) 1991.39,1010 2016.52,1035.13 C18.2 ; v1@2035,2225.53 v1(2035.4,2225.13) 2035.8,2224.72 U1.6 ; J7.6 2098.19,412.76 v1(2129.03,443.61) ; v1(2134.23,2022.17) U1.173 ; v1(2134.23,2056.58) 2134.48,2056.58 2149.2,2041.86 U1.174 ; v1@2144.63,1750 v1(2146.34,1748.29) 2148.05,1746.58 U1.159 ; v1(2150.71,1589.1) U1.151 ; U1.134 2212.76,1253.68 2245.91,1253.68 2284.67,1214.92 v1(2284.67,1200.18) ; C8.2 2336.59,2007.7 2347.38,2018.49 2354.08,2025.19 ; C9.2 2321.8,2049.36 2334.88,2049.36 2354.08,2030.16 2354.08,2025.19 ; v1(2367.66,2026.58) 2366.27,2025.19 2354.08,2025.19 ; C7.2 v1(2367.66,2206.77) ; v1(2392.72,1465) C20.2 ; C19.2 2393.59,1193.11 v1(2405.18,1181.53) ; U3.10 2605,2910 v1(2625,2930) ; R7.2 v1(2785,250) v1@2786.46,251.46 ; J12.01 J12.02 ; J12.38 J12.36 J12.34 J12.32 J12.30 J12.28 J12.26 J12.24 J12.22 J12.20 J12.18 J12.16 J12.14 J12.12 J12.10 J12.08 J12.06 J12.04 J12.02 ; v1(2922.44,2790) 2922.44,2720.74 J12.02 ; R8.2 v1(3047.31,251.46) v1@3050.85,255 ; C2.2@1570.45,2604.09 C2.2@1570.45,2614 ; C2.2@1570.45,2604.09 C2.2 C2.2@1570.45,2614
  Bottom Layer w6: J4.4 J4.6 J4.8 J4.10 J4.12 J4.14 J4.16 J4.18 J4.20 J4.22 J4.24 J4.26 J4.28 J4.30 J4.32 J4.34 J4.36 J4.38 J4.40 J4.39 ; J4.3 J4.5 J4.7 J4.9 J4.11 J4.13 J4.15 J4.17 J4.19 J4.21 J4.23 J4.25 J4.27 J4.29 J4.31 J4.33 J4.35 J4.37 J4.39 ; v1(1080,2715) J4.39 ; v1(2015,1795) C21.2 ; U5.24 v1(2212,1027) ; v1(2922.44,2790) 2945,2767.44 2945,2737 2967,2715 J5.40@2987.08,2715 ; J5.18@2987.08,1615 J5.4@2987.08,915 ; J5.34@2987.08,2415 J5.40@2987.08,2715 ; J5.17@3185.9,1615 J5.3@3185.9,915 ; J5.39@3185.9,2715 J5.3@3185.9,915 ; J5.4@2987.08,915 J5.3@3185.9,915 ; J5.4@2987.08,915 J5.40@2987.08,2715
"GPIO PA2": LED1.2 U1.130 | length 1088.1
  Top Layer w6: v1(2044.6,972) 2094.86,1022.26 U1.130 ; v1(2630,530) 2633.44,526.56 2633.44,509.27 2657.72,485 LED1.2
  PWR w6: v1(2044.6,972) 2486.6,530 v1(2630,530)
"GPIO PA3": LED2.2 U1.131 | length 1376.6
  Top Layer w6: v1(2044.95,902) 2114.54,971.59 U1.131 ; v1(2880,505) 2900,485 LED2.2
  PWR w6: v1(2044.95,902) 2441.95,505 v1(2880,505)
"GPIO PA4": J11.07 U1.49 | length 1720.5
  Top Layer w6: J11.07@347.52,2425 J11.07 264.99,2425 246.5,2443.49 246.5,2551 262.5,2567 392.75,2567 444,2515.75 444,2511.86 476.61,2479.25 1022.75,2479.25 1267.27,2234.73 1267.27,2123.71 1308.44,2082.54 1308.44,2020.8 1290.91,2003.27 1210.8,2003.27 U1.49
"GPIO PA15": J12.37 U1.139 | length 816.8
  Top Layer w6: U1.139@2212.76,1352.1 U1.139 2405.18,1352.88 2483.73,1274.33 2483.73,1049.73 2613.46,920 J12.37
"GPIO PB0": J11.10 U1.55 | length 958.7
  Top Layer w6: J11.10@552.44,2325 738,2325 925,2138 925,1935.56 976.18,1884.38 U1.55
"GPIO PB1": J11.12 U1.56 | length 825.1
  Top Layer w6: J11.12 612.93,2225 973.24,1864.69 U1.56
"GPIO PB2": J11.09 U1.57 | length 1128.9
  Top Layer w6: J11.09@347.52,2325 440,2325 458.69,2306.31 458.69,2297.17 459,2296.86 459,2253.14 458.69,2252.83 458.69,2197.17 459,2196.86 459,2191 489,2161 632.56,2161 944.87,1848.69 1008.88,1848.69 1012.57,1845.01 U1.57
"GPIO PB3": J12.23 U1.162 | length 585.8
  Top Layer w6: U1.162 2391.09,1805.64 2581.72,1615 2711.78,1615 J12.23
"GPIO PB4": J12.21 U1.163 | length 552.6
  Top Layer w6: U1.163 2471.4,1825.32 2581.72,1715 2711.78,1715 J12.21
"GPIO PB5": J12.19 U1.164 | length 519.3
  Top Layer w6: U1.164 2551.72,1845.01 2581.72,1815 2711.78,1815 J12.19
"GPIO PC3_C": AC1.4 U1.37 | length 870.7
  Top Layer w6: v1(1240,2685.62) 1240,2455.9 1425.57,2270.34 U1.37 ; v1@1440,2690 v1(1440.16,2690.16) 1440.32,2690.32 AC1.4
  PWR w6: v1(1240,2685.62) 1242.27,2687.89 1437.89,2687.89 v1(1440.16,2690.16)
"GPIO PC4": J11.03 U1.53 | length 1456.1
  Top Layer w6: J11.03@347.52,2625 427,2625 477,2575 v1(1017.26,2575) ; v1(1065,2310) 1065,2009.75 1151,1923.75 U1.53
  PWR w6: v1(1017.26,2575) 1065,2527.26 v1(1065,2310)
"GPIO PC5": J11.05 U1.54 | length 1390
  Top Layer w6: J11.05@347.52,2525 412.13,2525 428,2509.13 428,2425.75 464.75,2389 843,2389 963,2269 963,2014 941,1992 941,1944 980.94,1904.06 U1.54
"GPIO PC10": J7.2 R9.1 U1.140 | length 1841.6
  Top Layer w6: U1.140 2211.21,1371.79 2178.06,1371.79 2114.54,1308.28 2114.54,1264.46 2271.42,1107.58 2271.42,955.47 R9.1 ; J7.2 2271.42,955 J7.2
"GPIO PC15": R10.1 U1.11 U3.7 | length 941.2
  Top Layer w6: U1.11 1937.38,2859.32 1973.82,2895.76 1973.82,2899.69 1984.6,2910.47 R10.1 1989,2910 U3.7
"GPIO PD14": J11.30 U1.97 | length 1067.5
  Top Layer w6: J11.30@552.44,1325 679,1325 939.7,1064.3 940,1064 1400.19,1064 1445.25,1109.06 U1.97
"GPIO PE0": J12.13 U1.170 | length 569.8
  Top Layer w6: U1.170 2429.84,1963.12 2581.72,2115 2711.78,2115 J12.13
"GPIO PE1": J12.11 U1.171 | length 603.1
  Top Layer w6: U1.171 2359.24,1982.8 2562.28,2185.84 2591.44,2215 2711.78,2215 J12.11
"GPIO PG15": J12.25 U1.161 | length 620.2
  Top Layer w6: U1.161 2211.98,1786.73 2212.76,1785.95 2287.68,1785.95 2539.19,1534.44 2602.34,1534.44 2621.78,1515 2711.78,1515 J12.25
I2C1-SCL: J12.05 R12.1 U1.165 | length 1125
  Top Layer w6: U1.165 2211.2,1865.47 2175.11,1865.47 2093.23,1947.36 2093.23,2073.56 2137.11,2117.44 2145.52,2117.44 2153.13,2125.06 2153.13,2190.62 2156.65,2194.13 2160.04,2195.07 ccw(c2153.13,2220.18) 2171.57,2201.78 2401.06,2431.27 R12.1 2408.94,2431.27 2492.66,2515 2711.78,2515 J12.05
I2C1-SDA: J12.03 R13.1 U1.166 | length 1422
  Top Layer w6: U1.166 2211.2,1885.16 2178.06,1885.16 2109.23,1953.99 2109.23,2066.94 2143.73,2101.44 2152.15,2101.44 2169.13,2118.43 2169.13,2155.5 2264.1,2250.47 R13.1 2543.93,2250.47 2564.78,2271.32 2771.43,2271.32 2792.28,2292.17 2792.28,2547.83 2771.87,2568.24 2737.2,2568.24 2716.78,2588.66 J12.03
I2C2-SCL: AC1.13 R1.1 U1.19 U4.8 | length 1708.8
  Top Layer w6: U4.8 U4.8@1339.21,3118.54 ; v1(1380,3076) 1380,3077.76 U4.8@1339.21,3118.54 ; v1(1530,3040) 1533.44,3036.56 1547.85,3036.56 1580.47,3003.94 R1.1 1580.47,2887.67 1550.77,2857.97 AC1.13 AC1.13@1550.77,2749.66 ; U1.19 1779.9,2200.1 1502.31,2477.69 1501.35,2477.69 1484.37,2494.68 1484.37,2495.63 1339.21,2640.79 U4.8@1339.21,3118.54
  PWR w6: v1(1380,3076) 1416,3040 v1(1530,3040)
I2C2-SDA: AC1.14 R2.1 U1.18 U4.7 | length 1504.4
  Top Layer w6: U4.7@1290,3138.23 1314.81,3163.04 1437.33,3163.04 1467.1,3133.26 1471.04,3133.26 1481.82,3122.48 R2.1 1481.82,3037.63 1531.08,2988.37 AC1.14 1531.08,2760.2 1516.91,2774.37 1425.43,2774.37 1410.78,2759.73 1410.78,2617.12 1799.51,2228.39 1799.51,2184.53 U1.18
I2C4-SCL: J11.14 R5.1 U1.62 | length 851.2
  Top Layer w6: J11.14 547.93,2125 567.37,2105.56 567.37,2077.63 668.39,2077.63 914.24,1831.78 993.99,1831.78 1014.62,1811.15 1023.79,1811.15 R5.1 1033.88,1797.13 1084.43,1746.58 U1.62
I2C4-SDA: J11.16 R6.1 U1.63 | length 818.9
  Top Layer w6: J11.16@552.44,2025 638,2025 801.22,1861.78 R6.1 801.22,1797.13 812,1786.35 825.11,1786.35 854.84,1756.62 930.89,1756.62 960.62,1726.9 U1.63
NetAC1_12: AC1.12 R3.1 | length 246.8
  Top Layer w6: AC1.12 1570.45,2768 ; R3.1 R3.1@1681.1,2768 ; 1570.45,2768 R3.1@1681.1,2768 ; 1570.45,2768 R3.1@1681.1,2768
NetC8_1: C8.1 C9.1 U1.172 | length 128.4
  Top Layer w6: U1.172 2212.42,2002.92 2249.53,2002.92 2255.52,2008.92 ; C8.1 2279.39,2008.92 2255.52,2008.92 ; C9.1 2280.61,2054.13 2255.52,2029.04 2255.52,2008.92
NetJ7_1: J7.1 R17.1 | length 753.7
  Top Layer w6: J7.1 2314.72,314.12 2382.06,381.45 2382.06,860.41 ; 2453.15,915 R17.1@2436.64,915 ; 2382.06,860.41 R17.1@2436.64,915 ; 2382.06,860.41 R17.1@2436.64,915
NetJ7_8: J7.8 R18.1 | length 613
  Top Layer w6: R18.1 1784.41,725 2011.57,497.83 J7.8
NetLED1_1: LED1.1 R7.1 | length 103.1
  Top Layer w6: R7.1 LED1.1
NetLED2_1: LED2.1 R8.1 | length 101.7
  Top Layer w6: R8.1 LED2.1
NetR4_2: R4.2 U3.9 | length 408.3
  Top Layer w6: U3.9 2711.47,2860 2825.47,2974 R4.2
NetR11_2: R11.2 U1.167 | length 153.7
  Top Layer w6: U1.167 2340.35,1904.06 2355.47,1888.94 R11.2
NetS2_2: S2.2 U5.30 | length 1845.5
  Bottom Layer w6: S2.2 710.99,334.01 1887.86,334.01 2154.4,600.55 2154.4,703.45 2146.78,711.07 2119.94,711.07 U5.30
NRST(Reset): C6.2 S1.4 U1.33 | length 1494.1
  Top Layer w6: S1.4 821.74,3016.52 893.54,2944.72 893.54,2942.75 906.29,2930 C6.2 908.26,2908 888,2908 870,2890 870,2784 888,2766 1127.32,2766 1159.32,2798 1272,2798 1306.66,2763.34 1306.66,2497.35 1504.31,2299.7 U1.33
QSPI-CLK: J11.18 U1.30 | length 2117.4
  Top Layer w6: v1(240,2315) 253.77,2297.17 255.52,2295.42 261.38,2289.56 311.41,2289.56 329.27,2271.7 406.19,2271.7 432,2245.89 432,1969 450.13,1969 494.13,1925 J11.18 J11.18@552.44,1925 ; v1(1523.99,2081.16) 1563.36,2120.53 U1.30
  PWR w6: v1(240,2315) 241.5,2316.5 387.37,2316.5 391.75,2312.12 527.75,2312.12 532.12,2316.5 830.5,2316.5 1065.84,2081.16 v1(1523.99,2081.16)
QSPI_BK1_IO0: J11.22 U1.94 | length 1157.8
  Top Layer w6: J11.22 553.63,1705.56 615.44,1705.56 1066.54,1254.46 1137.5,1254.46 1176.09,1215.87 1287.58,1215.87 1321.72,1250 1365.36,1250 1386.2,1229.16 U1.94
QSPI_BK1_IO1: J11.24 U1.95 | length 1135.6
  Top Layer w6: J11.24 574.25,1625 593.69,1605.56 593.69,1587.31 1066,1115 1405.88,1115 U1.95
QSPI_BK1_IO2: J11.20 U1.1 | length 2004.5
  Top Layer w6: J11.20@552.44,1825 618,1825 781,1662 v1(965,1662) ; U1.1 2134.23,2220.46 2138.46,2220.46 2150,2232 v1(2150,2236.23)
  PWR w6: v1(965,1662) 1193.22,1890.22 1830.22,1890.22 2150,2210 v1(2150,2236.23)
QSPI_BK1_IO3: J11.28 U1.96 | length 1074.3
  Top Layer w6: J11.28@552.44,1425 630,1425 975,1080 1393.57,1080 1425.57,1112 U1.96
QSPI_BK1_NCS: J11.26 U1.78 | length 1306.1
  Top Layer w6: J11.26@552.44,1525 J11.26@487,1525 ; U1.78 1065.74,1431.62 1063.26,1431.62 1059.74,1435.14 1003.52,1494.84 ; J11.26@487,1525 J11.26@487,1537.13 ; J11.26@487,1525 J11.26@487,1537.13 ; J11.26@487,1537.13 479.69,1544.44 476.77,1544.44 460,1561.21 460,1595.86 458.69,1597.17 458.69,1752.83 466.3,1760.44 471.3,1760.44 484.44,1760.44 485,1761 628,1761 828,1561 933.88,1561 ; 933.88,1561 1002.53,1495.83 ; 933.88,1561 1002.53,1495.83 ; 1002.53,1495.83 cw(c985.32,1477.7) 1003.52,1494.84 ; 1002.53,1495.83 cw(c985.32,1477.7) 1003.52,1494.84
QSPI_BK2_IO0: J11.32 U1.67 | length 1455.6
  Top Layer w6: J11.32 700.58,1225 895.58,1030 v1(1010,1030) ; U1.67 v1(1331,1648.16)
  PWR w6: v1(1010,1030) 1056,1030 1331,1305 v1(1331,1648.16)
QSPI_BK2_IO1: J11.34 U1.68 | length 1698.8
  Top Layer w6: J11.34 456,1125 426.69,1154.31 426.69,1829 472.69,1875 616,1875 756,1735 927.36,1735 1033.88,1628.47 U1.68
QSPI_BK2_IO2: J11.36 U1.69 | length 1828.2
  Top Layer w6: J11.36 616,1025 632,1041 632,1154 606,1180 465,1180 442.69,1202.31 442.69,1759.45 460.23,1777 635,1777 803.21,1608.79 U1.69
QSPI_BK2_IO3: J11.38 U1.72 | length 1025.2
  Top Layer w6: J11.38 631.25,925 640.13,933.88 v1(645,933.88) ; v1(1154.7,1530.05) 1174.38,1549.73 U1.72
  PWR w6: v1(645,933.88) 645,1088.46 1086.59,1530.05 v1(1154.7,1530.05)
SPI1-CLK: J7.5 R15.1 U1.50 | length 2869.2
  Top Layer w6: U1.50 1277.2,1982.8 v1(1478,1782) ; v1@1775,695 v1(1775,688.47) 1814.53,648.94 R15.1 ; J7.5 2128.75,292.71 2128.75,277.47 2119.32,268.05 1891.23,268.05 1820,339.28 ; 1820,339.28 1820,645 1820,339.28
  PWR w6: v1(1478,1782) 1479.62,1267.71 ; v1(1775,688.47) 1478,985.46 1478,1019.47 ; 1478,1019.47 1479.62,1267.47 ; 1478,1019.47 1479.62,1267.47 ; 1479.62,1267.47 ccw(c1454.62,1267.63) 1479.62,1267.71 ; 1479.62,1267.47 ccw(c1454.62,1267.63) 1479.62,1267.71
SPI1-MISO: J7.7 R16.1 U1.51 | length 2190.7
  Top Layer w6: U1.51 1256.88,1963.12 1933,1287 2057.08,1287 2154,1190.08 2154,1041.66 2152.94,1040.6 R16.1 2154,876.41 2154,800.1 2054.88,700.98 J7.7
SPI1-MOSI: J7.3 R14.1 U1.52 | length 2691.3
  Top Layer w6: U1.52 1210.8,1942.65 1243.94,1942.65 1251.56,1935.04 1251.56,1918.13 v1(1305,1864.69) ; J7.3 2228.11,279.89 2240,268 2509.83,268 2535,293.17 2535,371.3 R14.1 2540.44,380.67 2529.66,391.45 2529.66,404.56 2513.66,420.56 2513.66,618.9 2521.43,626.67 2521.43,825.01 2481.44,865 v1(2422,865)
  PWR w6: v1(1305,1864.69) 1430.66,1864.69 2418.56,876.8 2418.56,868.44 v1(2422,865)
SPI2-MISO: J11.06 U1.36 | length 1414.8
  Top Layer w6: J11.06@552.44,2525 1008.38,2525 1194,2710.62 1263.38,2710.62 1274,2700 1274,2444.53 1445.25,2273.28 U1.36
SPI2-MOSI: J11.04 U1.35 | length 1497.6
  Top Layer w6: J11.04 553.63,2644.44 611.94,2644.44 717.5,2750 1143,2750 1175,2782 1258,2782 1290,2750 1290,2489.55 1464.94,2314.61 U1.35
SPI2-SCK: J11.08 U1.86 | length 1710.6
  Top Layer w6: J11.08@552.44,2425 840,2425 1014.62,2250.38 v1(1014.62,1992) ; v1(965,1465.38) 1156.23,1274.14 U1.86
  PWR w6: v1(965,1465.38) 923,1507.38 923,1920 993.62,1990.62 1013.24,1990.62 v1(1014.62,1992)
SPI5-CLK: U1.27 U3.16 | length 1753.6
  Top Layer w6: v1(1484.47,2450.02) 1600.36,2334.13 1600.36,2225.11 1622.42,2203.06 U1.27 ; v1@2335,3075 v1(2336,3075) 2471,3210 U3.16
  PWR w6: v1(1484.47,2450.02) 1560.12,2450.02 1600.77,2409.37 1695.98,2409.37 2336,3049.39 v1(2336,3075)
SPI5-MISO: U1.29 U3.8 | length 1098.8
  Top Layer w6: v1(1583.05,2085.54) U1.29 ; v1(2043,2567) 2119.57,2643.57 2119.57,2849.22 2130.35,2860 U3.8
  PWR w6: v1(1583.05,2085.54) 2043,2545.49 v1(2043,2567)
SPI5-MOSI: U1.28 U3.15 | length 1568.5
  Top Layer w6: U1.28 1603.51,2158.2 1603.51,2125.06 1637.2,2091.37 v1@1638.58,2091.37 ; v1(1990,2425) 2402,2837 2402,3105 2457,3160 U3.15
  PWR w6: v1(1640.7,2089.25) 1744.36,2192.91 1757.91,2192.91 v1(1990,2425)
SPI6-MISO: J12.35 U1.156 | length 1189.6
  Top Layer w6: U1.156 2253,1687.53 2460.97,1479.56 2760.55,1479.56 2792.28,1447.83 2792.28,1092.17 2776.28,1076.17 2776.28,1039.44 2756.84,1020 J12.35 ; J12.35@2661.84,1015 J12.35@2681.28,1034.44
SPI6-MOSI: J12.31 U1.158 | length 830.8
  Top Layer w6: U1.158 2292.1,1726.9 2496.37,1522.63 v1(2496.37,1519.83) ; v1(2501.44,1319.51) 2562.28,1258.67 2638.05,1258.67 2676.73,1220 J12.31
  PWR w6: v1(2496.37,1519.83) 2498.91,1517.29 2498.91,1322.05 v1(2501.44,1319.51)
SPI6-SCK: J12.33 U1.157 | length 947.2
  Top Layer w6: U1.157 2275.79,1707.21 v1(2451.15,1531.85) ; v1(2525,1125) 2535,1115 2711.78,1115 J12.33
  PWR w6: v1(2451.15,1531.85) 2451.15,1334.45 2525,1260.6 v1(2525,1125)
SWCLK: J1.1 U1.138 U5.13 | length 2026.2
  Top Layer w6: v1(1005.08,800) J1.1 ; U1.138 2212.76,1332.42 2245.91,1332.42 2280.82,1297.51 v1(2388.34,1297.51)
  Bottom Layer w6: v1(1005.08,800) 1000,824 1000,930 1259.25,1189.25 1380,1189.25 1415.75,1225 1525.62,1225 U5.13 1543.56,1242.94 1770.34,1242.94 1938.47,1411.07 2274.79,1411.07 v1(2388.34,1297.51)
SWDIO: J1.2 U1.132 U5.4 | length 1489.2
  Top Layer w6: J1.2 J1.2@1075,984 ; v1(2000,870) 2048.31,870 2134.23,955.92 U1.132 ; J1.2@1075,984 v1(1125,984) J1.2@1075,984
  Bottom Layer w6: v1(1125,984) 1316.07,792.94 1511.69,792.94 U5.4 1907,777 v1(2000,870)
UART4-RX: J12.17 U1.168 | length 506.4
  Top Layer w6: U1.168 2713.04,1923.75 J12.17
UART4-TX: J12.15 U1.169 | length 536.5
  Top Layer w6: U1.169 2510.16,1943.43 2581.72,2015 2711.78,2015 J12.15
UART5-RX: J12.27 U1.145 | length 525.9
  Top Layer w6: U1.145 2271,1470.99 2315.99,1426 2710.78,1426 J12.27
UART5-TX: J12.29 U1.142 | length 542.9
  Top Layer w6: U1.142 2302.06,1411.94 2326,1388 2608.73,1388 2676.73,1320 J12.29
USART2-RX: J12.07 U1.149 | length 1238.6
  Top Layer w6: U1.149 v1(2287.05,1549.73) ; v1(2520,2415) 2711.78,2415 J12.07
  PWR w6: v1(2287.05,1549.73) 2287.76,1549.73 2302.25,1564.23 2306.49,1564.23 2406,1663.73 2406,2301 v1(2520,2415)
USART2-TX: J12.09 U1.148 | length 1211.9
  Top Layer w6: U1.148 2271.38,1530.05 2276.69,1524.73 2280.32,1524.73 v1(2312.05,1493) ; v1(2538,2315) 2711.78,2315 J12.09
  PWR w6: v1(2312.05,1493) 2425.02,1605.98 2425.02,2202.02 v1(2538,2315)
USART6-RX: J1.5 U1.123 U5.12 | length 1469.3
  Top Layer w6: v1(1225,964.33) 1225,887.6 1275,837.6 J1.5 1297,822 1297,862.62 1323.74,889.36 1757.43,889.36 1957.06,1088.99 U1.123
  Bottom Layer w6: v1(1225,964.33) 1437.67,1177 U5.12
USART6-TX: J1.6 U1.122 U5.15 | length 2336.5
  Top Layer w6: v1(975,717.46) 975,950.32 1036.98,1014.02 ; 1037,1014.04 1037,1016.48 1037,1032.94 1044.62,1040.56 1205.38,1040.56 1221.38,1024.56 1253,1024.56 J1.6@1275,1002.56 ; J1.6 J1.6@1275,1002.56 ; U1.122 1937.38,1091.93 1893.44,1048 1320.44,1048 J1.6@1275,1002.56
  Bottom Layer w6: v1(975,717.46) 978.44,720.91 978.44,728.34 980.08,729.98 980.08,945.38 979.15,946.31 979.15,948.59 979.15,951.07 ; U5.15 1511.69,1311.07 1464.05,1311.07 1439.59,1286.6 1336.09,1286.6 980.98,952.9 ; 979.15,951.07 980.91,952.83 ; 979.15,951.07 980.91,952.83 ; 980.91,952.83 cw(c985.15,948.59) 980.98,952.9 ; 980.91,952.83 cw(c985.15,948.59) 980.98,952.9
pads on no net: AC1.9 AC1.10 AC1.11 J1.7 J1.8 J1.9 J1.10 J4.41 J4.42 J5.41 J5.42 J7.9 J7.10 J7.11 J7.12 J7.13 J7.14 J7.15 J11. J12. LED1.3 LED1.4 LED2.3 LED2.4 S1.2 S1.3 S2.3 S2.SH1 S2.SH2 U1.2 U1.3 U1.4 U1.5 U1.7 U1.8 U1.9 U1.10 U1.13 U1.14 U1.15 U1.16 U1.17 U1.20 U1.21 U1.22 U1.23 U1.25 U1.26 U1.31 U1.32 U1.34 U1.41 U1.42 U1.43 U1.46 U1.58 U1.59 U1.60 U1.61 U1.66 U1.73 U1.74 U1.75 U1.76 U1.77 U1.79 U1.80 U1.82 U1.85 U1.87 U1.88 U1.89 U1.90 U1.91 U1.98 U1.101 U1.102 U1.103 U1.104 U1.105 U1.106 U1.107 U1.108 U1.109 U1.110 U1.111 U1.114 U1.115 U1.116 U1.117 U1.118 U1.120 U1.121 U1.124 U1.125 U1.127 U1.128 U1.129 U1.133 U1.135 U1.137 U1.141 U1.143 U1.144 U1.146 U1.147 U1.150 U1.153 U1.154 U1.155 U3.4 U3.5 U3.6 U3.11 U3.12 U3.13 U3.14 U4.5 U4.6 U5.1 U5.2 U5.3 U5.5 U5.6 U5.7 U5.8 U5.9 U5.10 U5.11 U5.14 U5.16 U5.17 U5.18 U5.19 U5.20 U5.21 U5.22 U5.23 U5.25 U5.26 U5.27 U5.28 U5.29 U5.31 U5.32

## Polygon pours and split planes (outlines as drawn)
3V3 on PWR "3V3_PWR" (solid, shelved, pour order 2): 0,3470 cw(c70,3470) 70,3540 330,3540 495,3375 3045,3375 3210,3540 3471,3540 cw(c3471,3471) 3540,3471 3540,3210 3375,3045 3375,495 3540,330 3540,70 cw(c3470,70) 3470,0 3210,0 3045,165 495,165 330,0 70,0 cw(c70,70) 0,70 0,330 165,495 165,3045 0,3210
GND on GND "NONET_L03_P003" (solid, shelved, pour order 3): 0,3470 cw(c70,3470) 70,3540 330,3540 495,3375 3045,3375 3210,3540 3471,3540 cw(c3471,3471) 3540,3471 3540,3210 3375,3045 3375,495 3540,330 3540,70 cw(c3470,70) 3470,0 3210,0 3045,165 495,165 330,0 70,0 cw(c70,70) 0,70 0,330 165,495 165,3045 0,3210

## Silkscreen, mask and mechanical layers (free items; w line width, h text height)
Bottom Overlay:
  drawing of 5 lines, arcs and shapes, not listed
Board Outline:
  the board outline again, w4